# Altium PCB PCB1.PcbDoc (part 1 of 4)
Units mm, origin at the board's own origin, x right, y up, seen from the top; angles counter-clockwise.
Board outline 49 x 49 mm, 8 copper layers (L1(SIG), L2(GND), L3(SIG), L4(GND), L5(PWR), L6(PWR), L7(GND), L8(SIG)), stack 1.6 mm thick; 175 components, 123 nets, 646 pads, 355 vias.
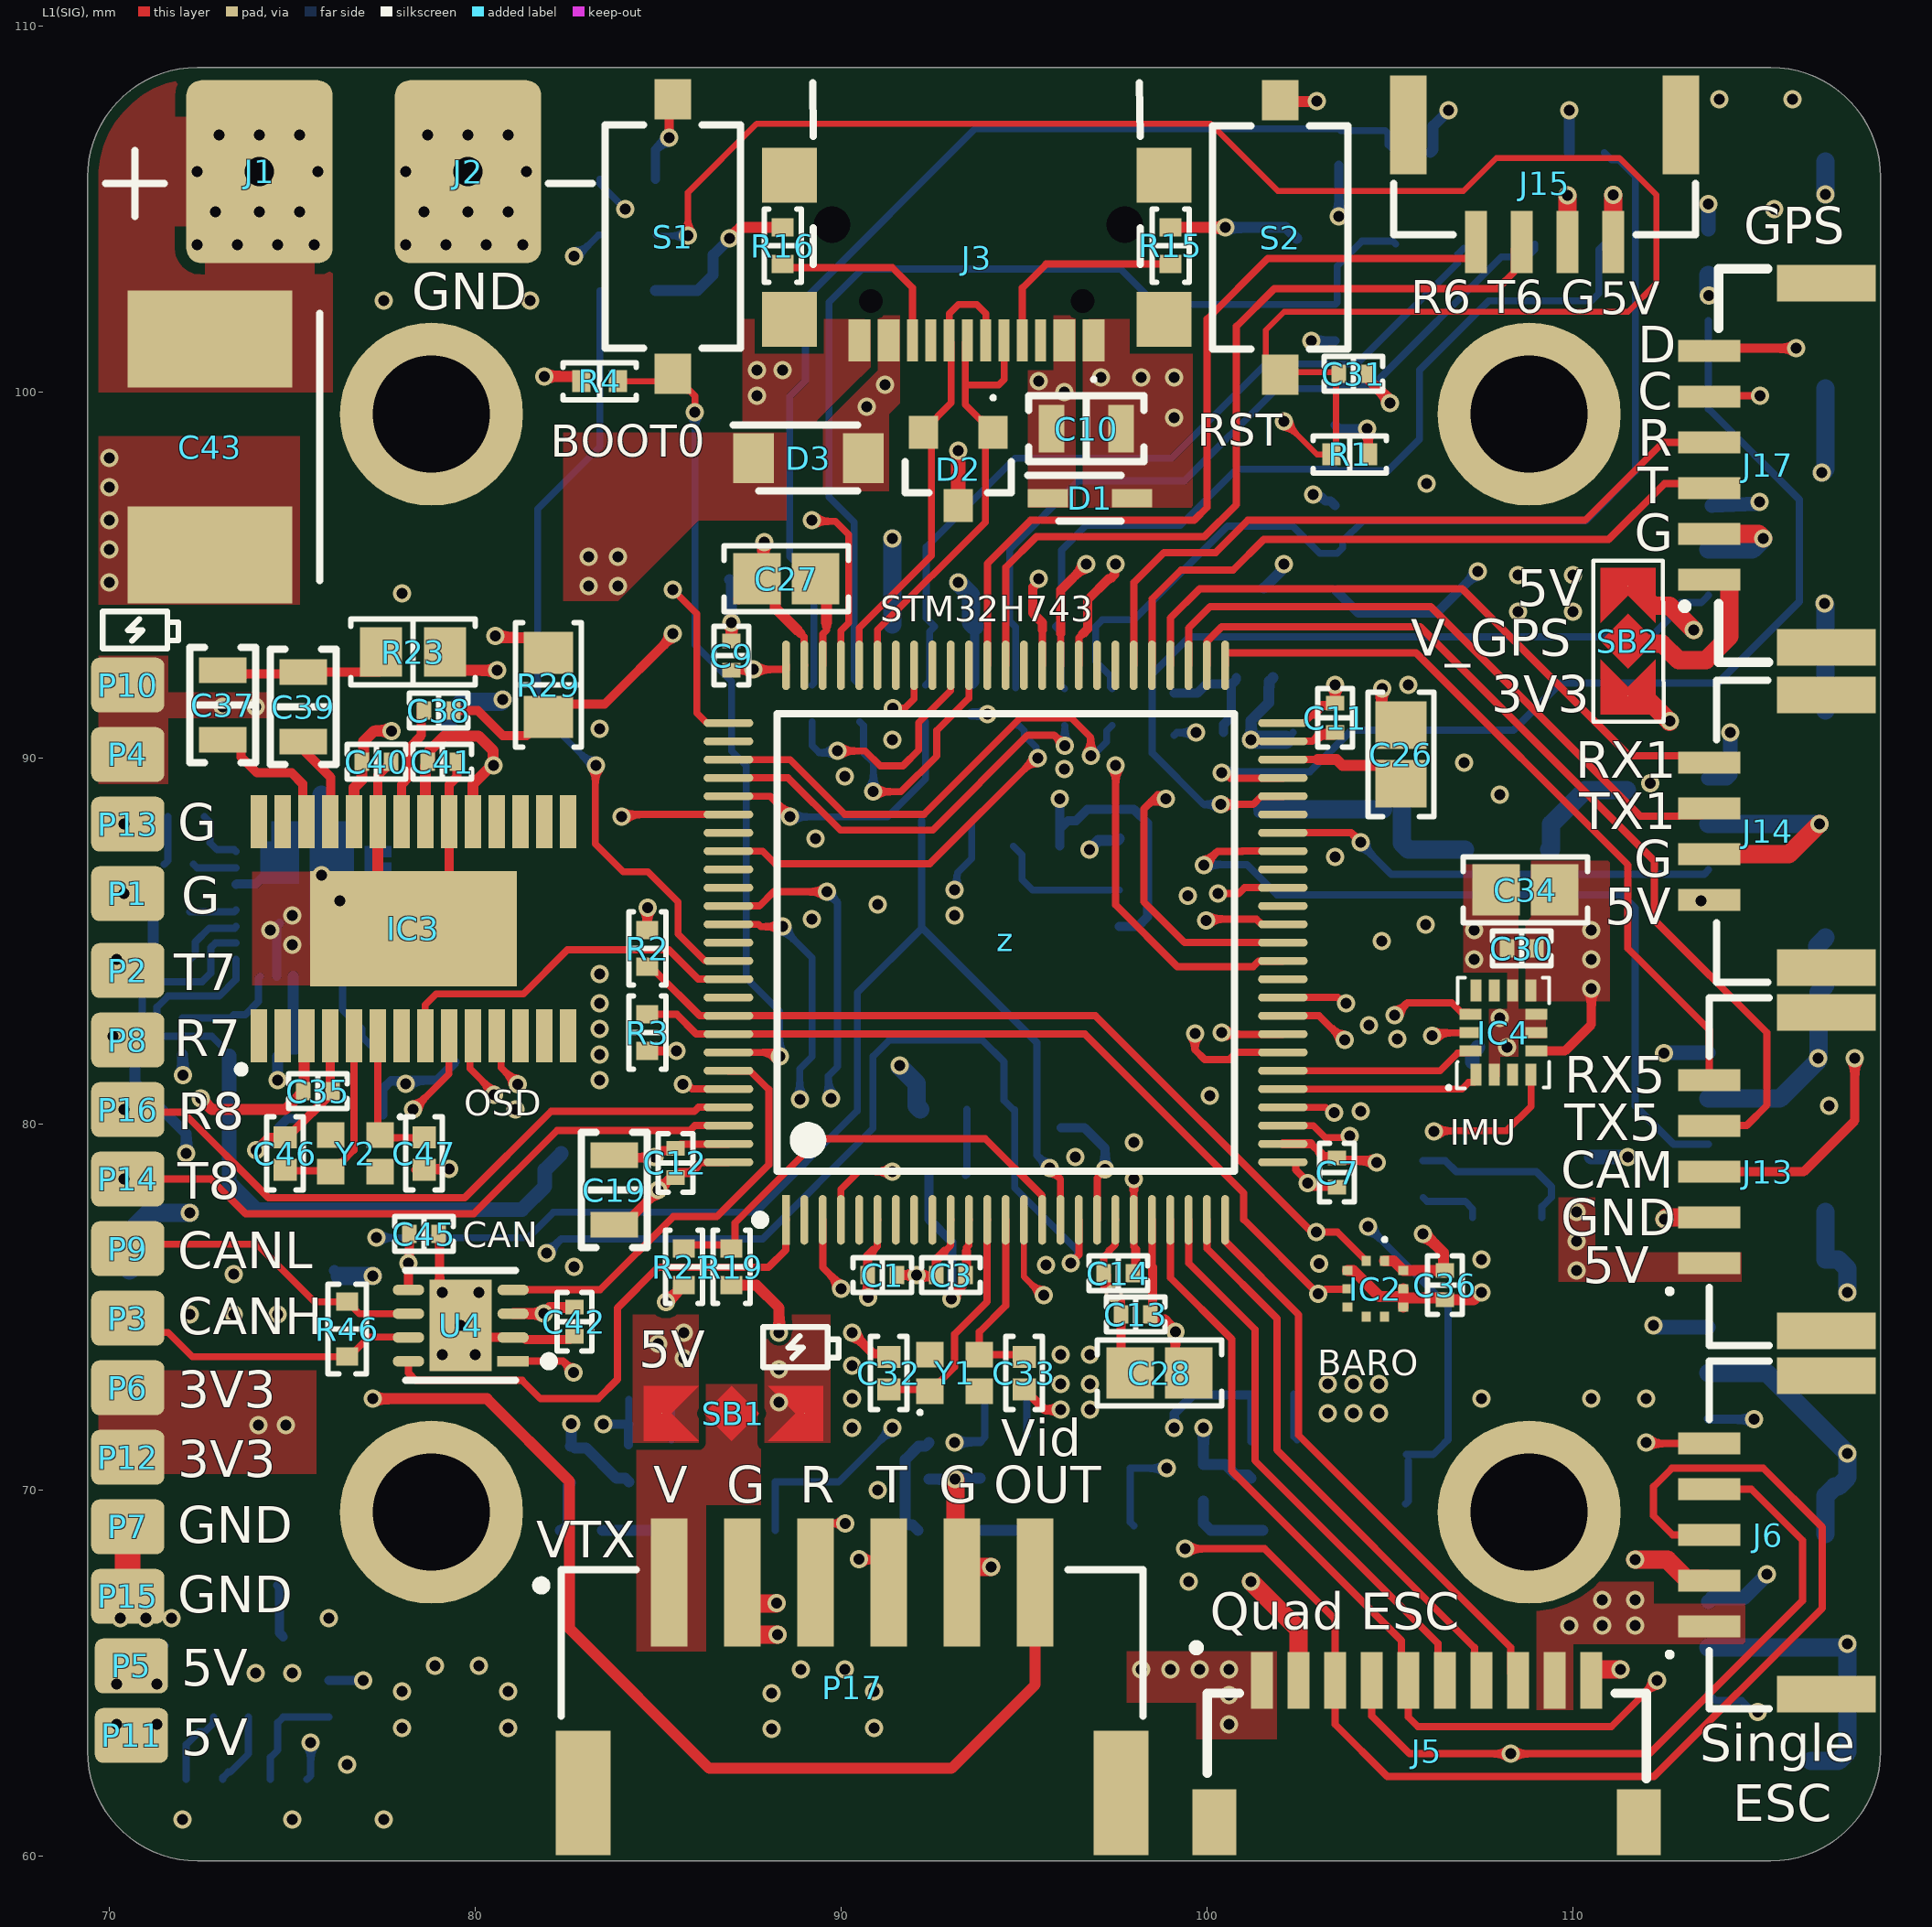
[diagram p0: L1(SIG) view]
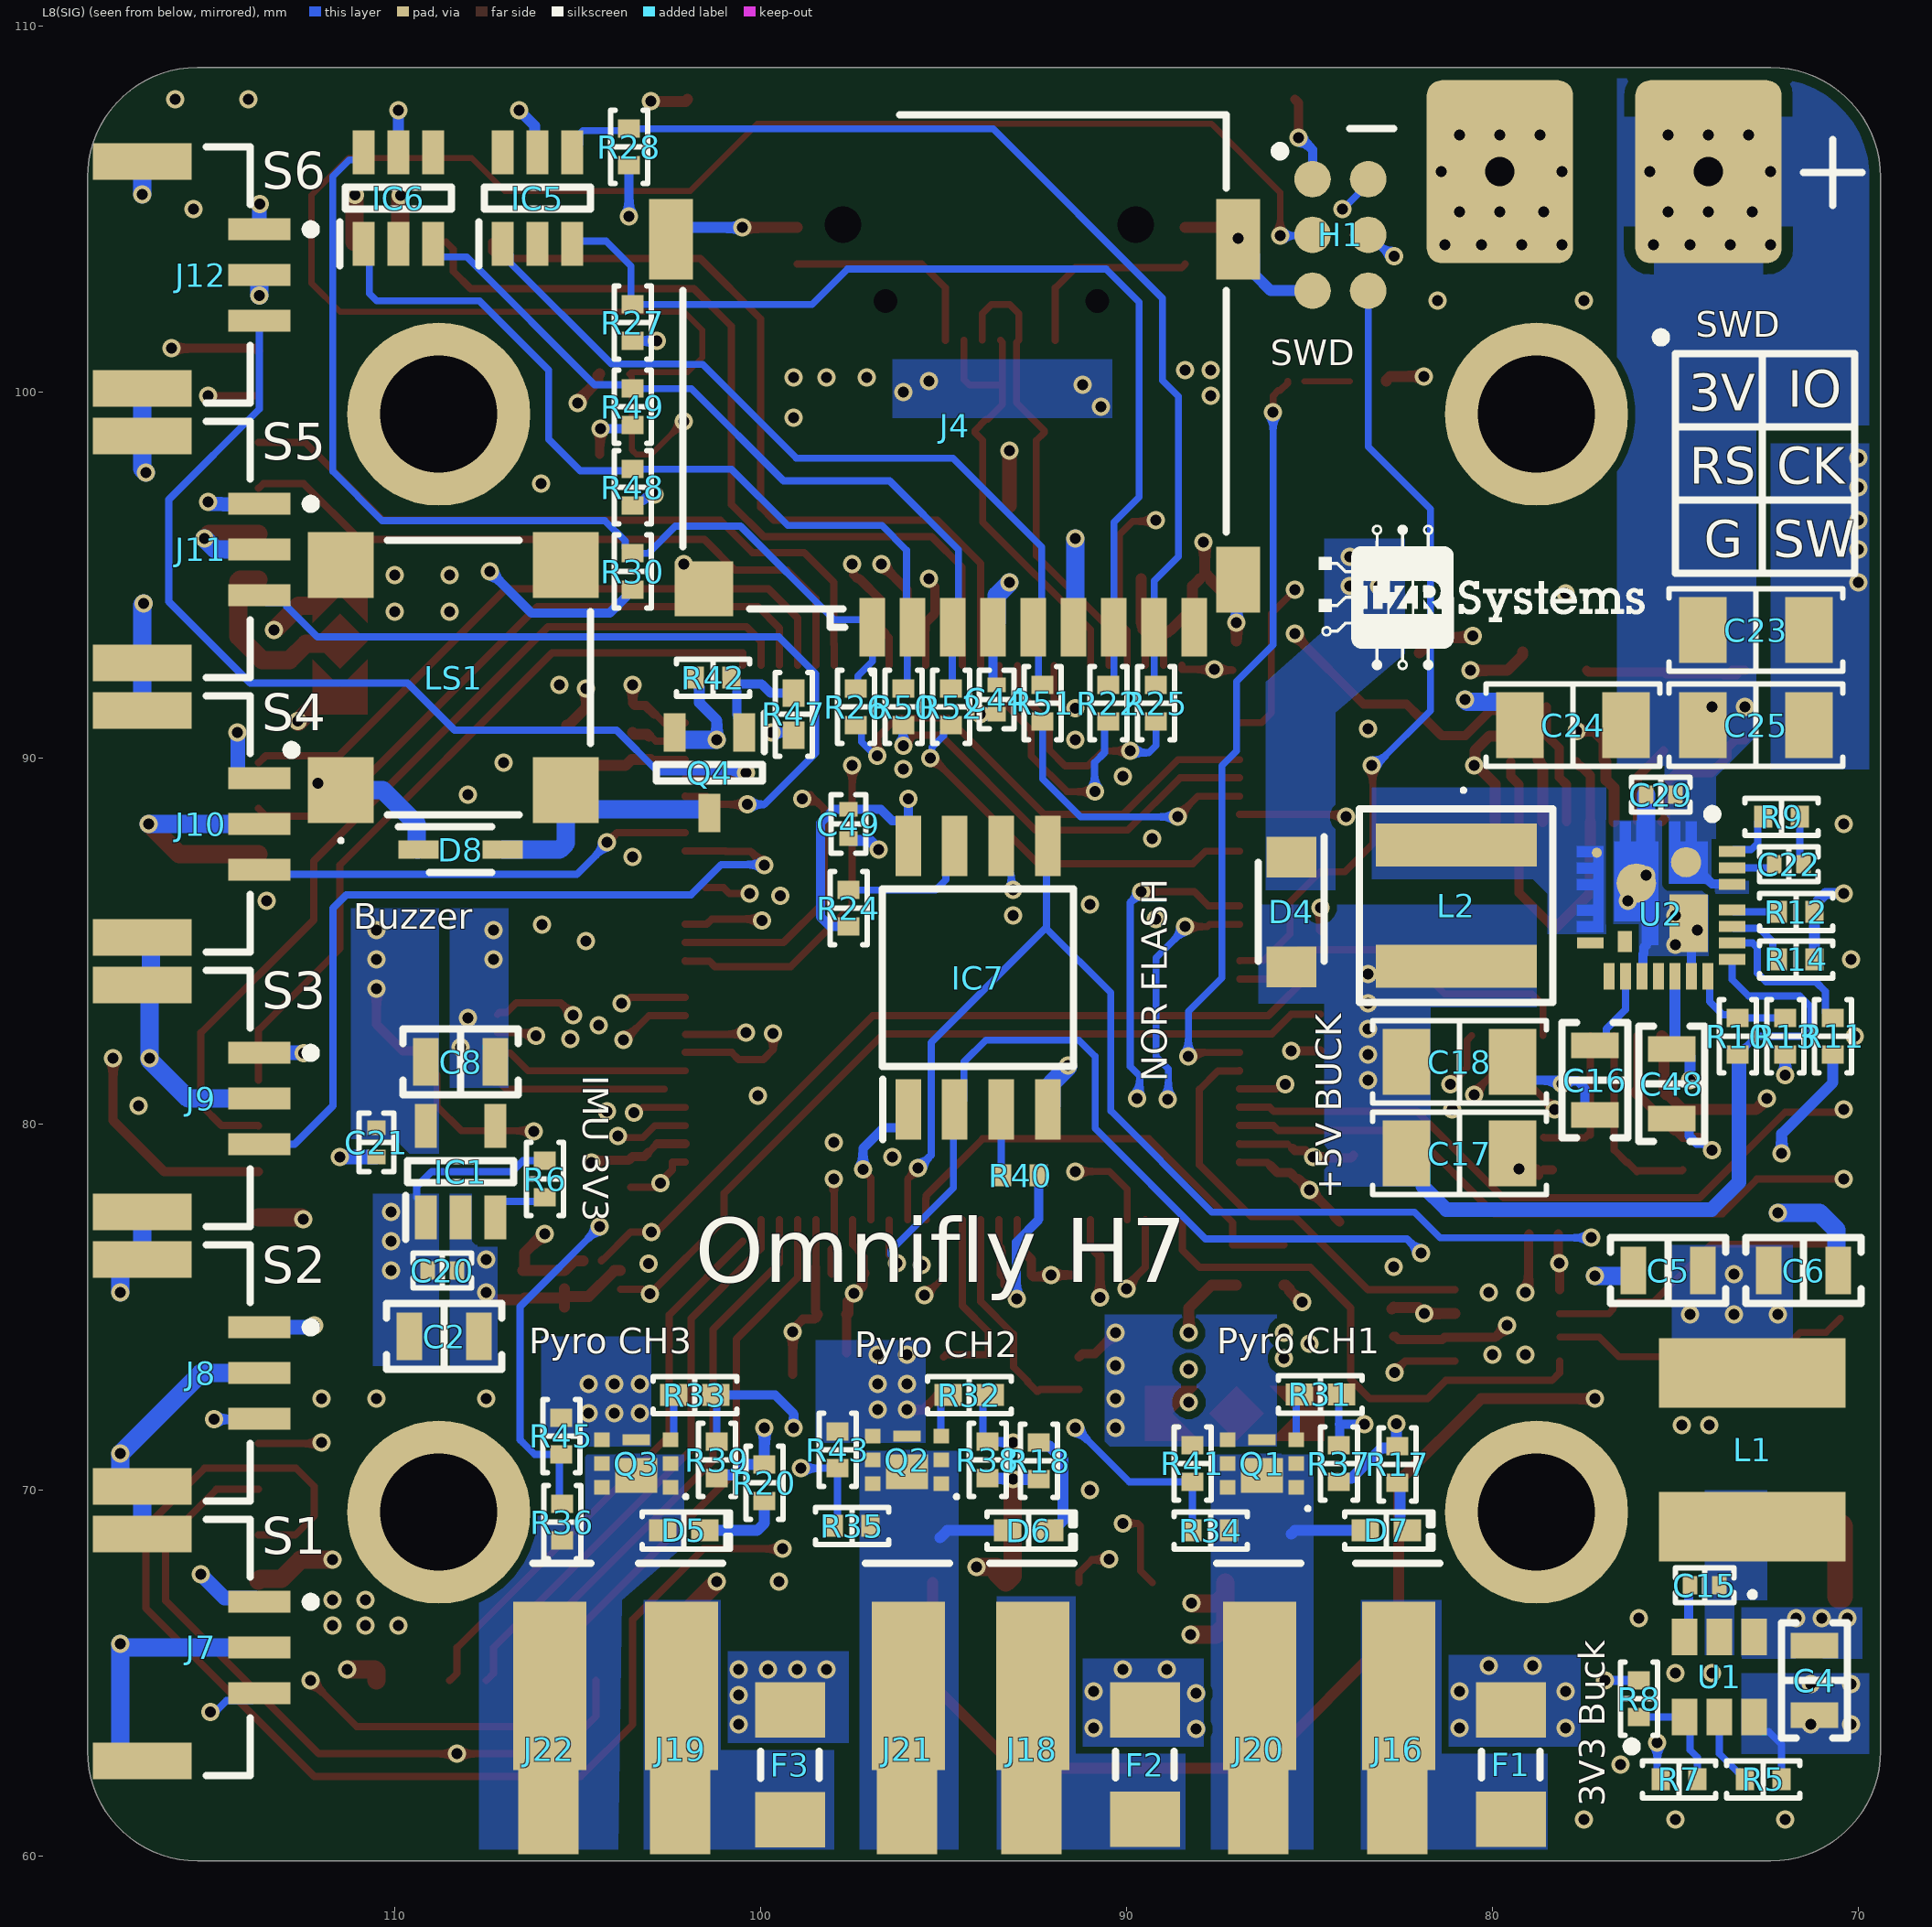
[diagram p1: L8(SIG) view, seen from below]
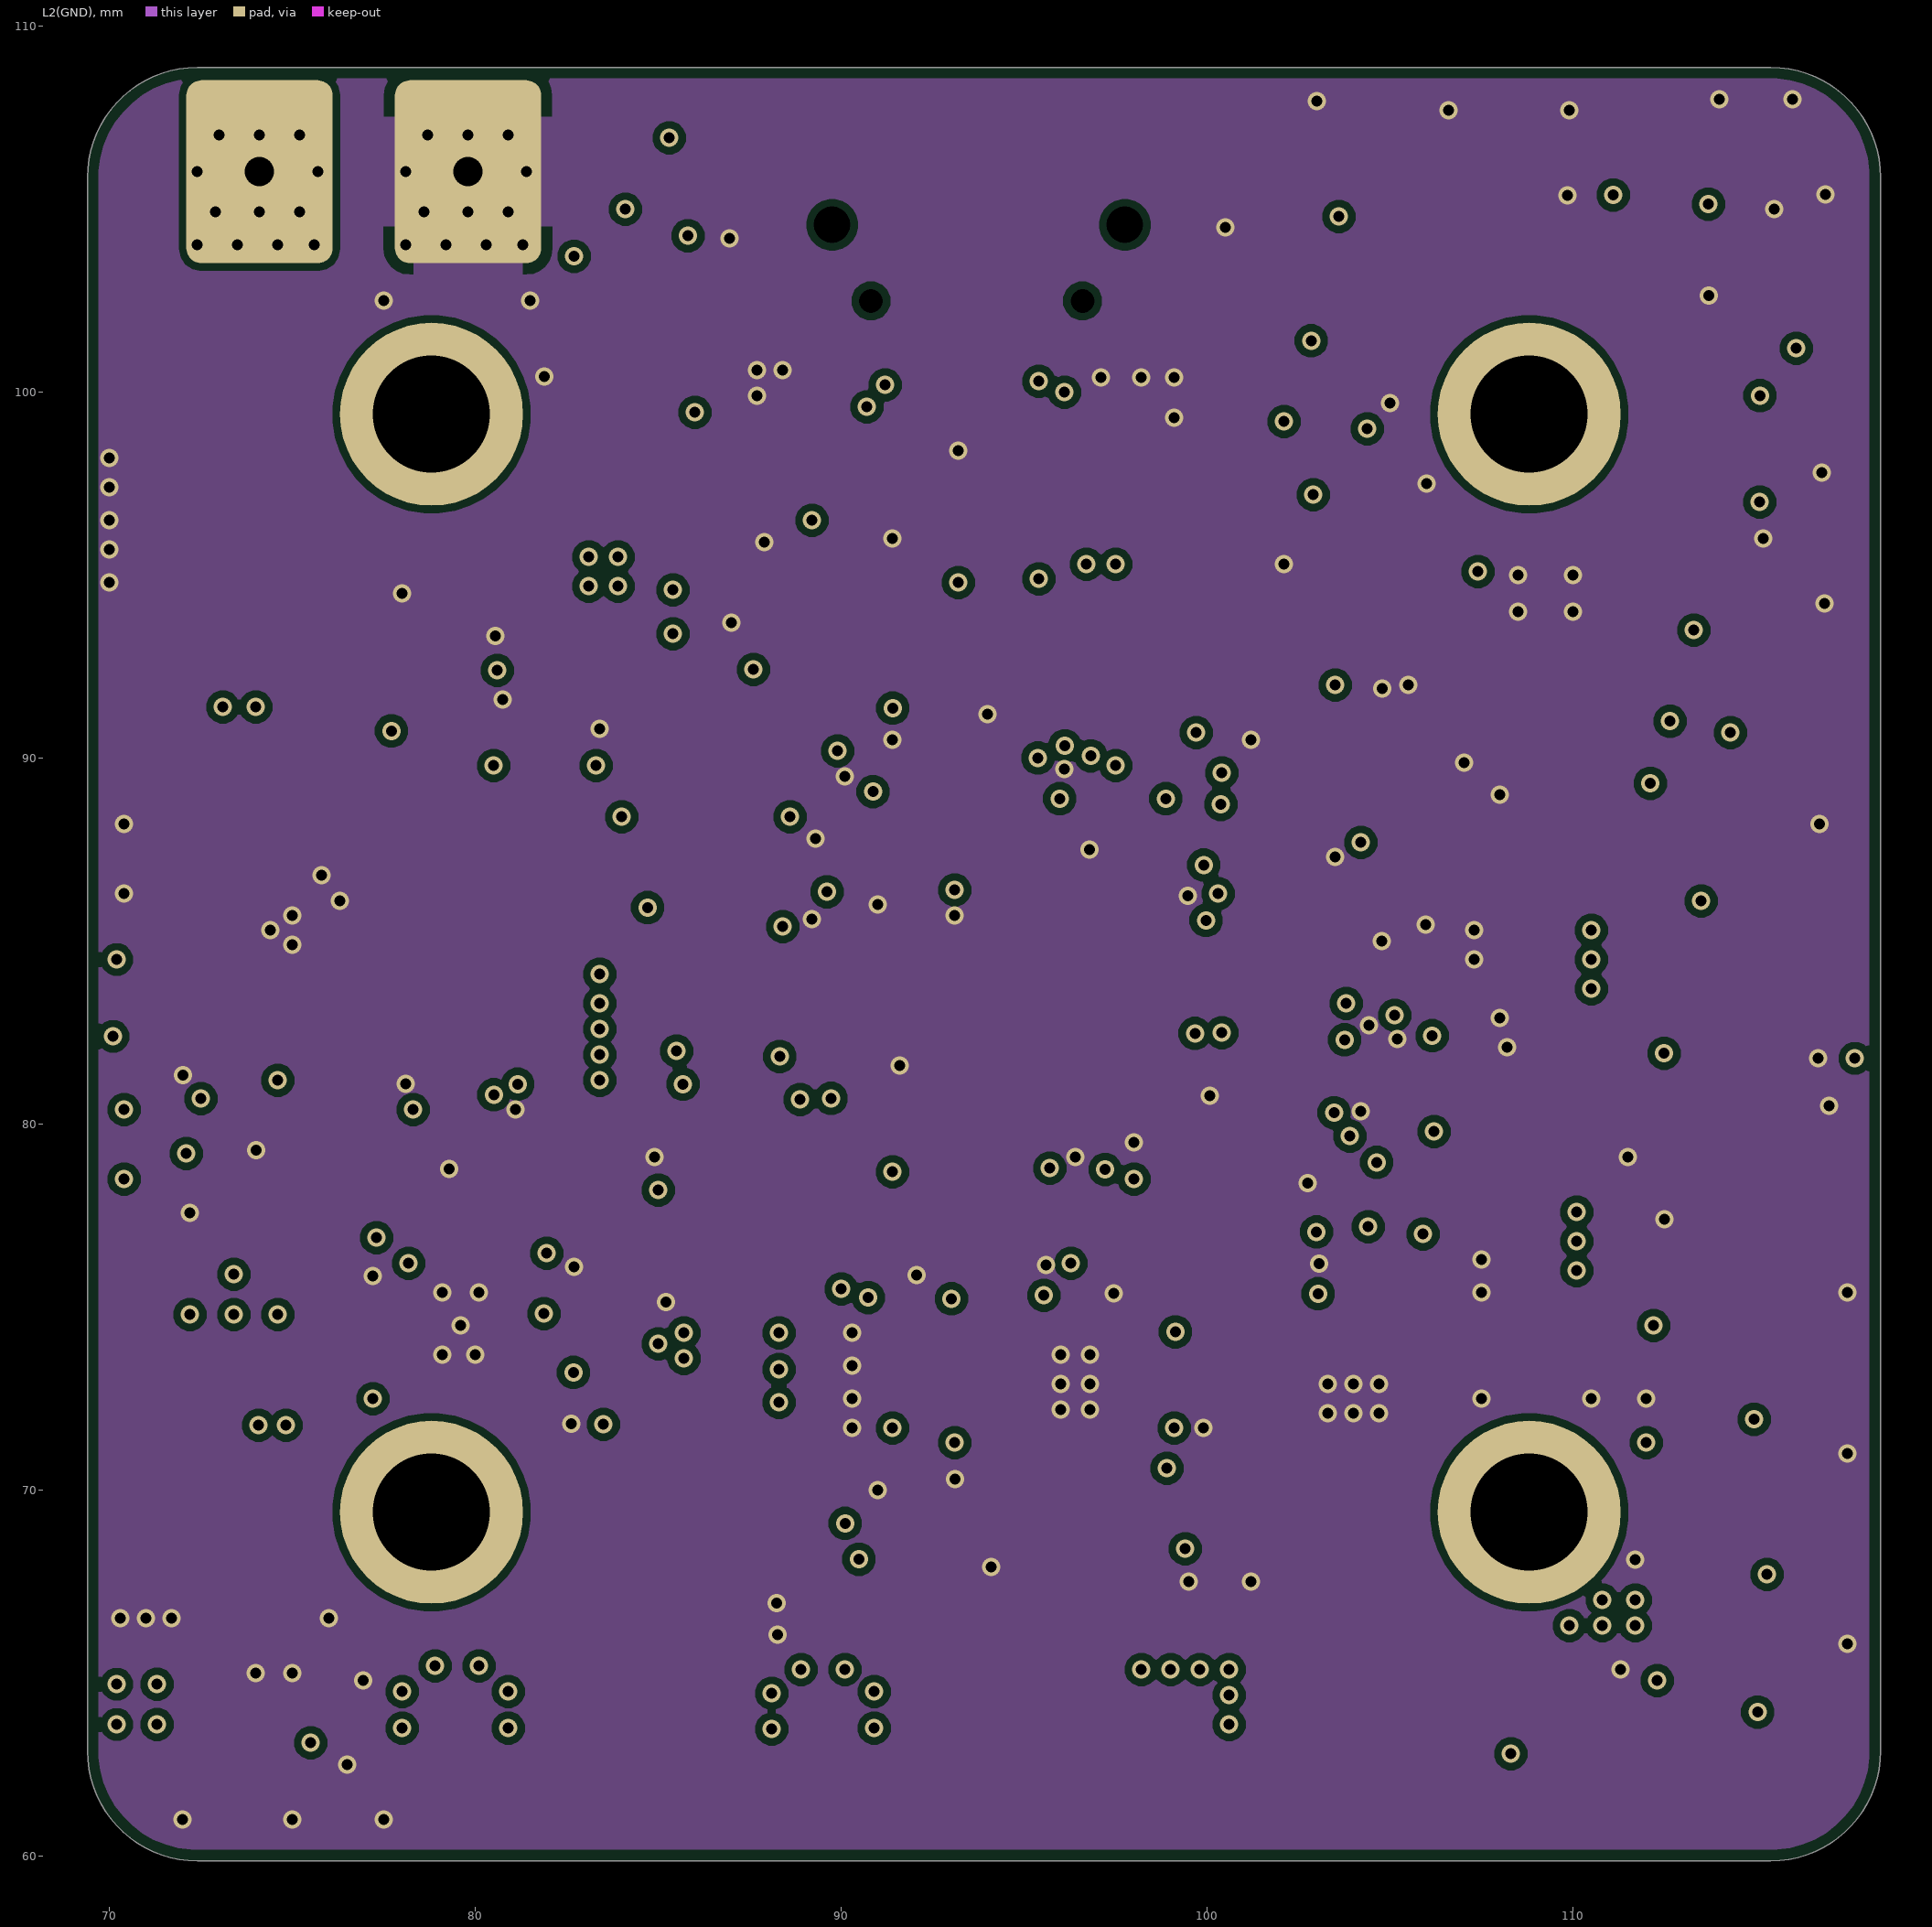
[diagram p2: L2(GND)]
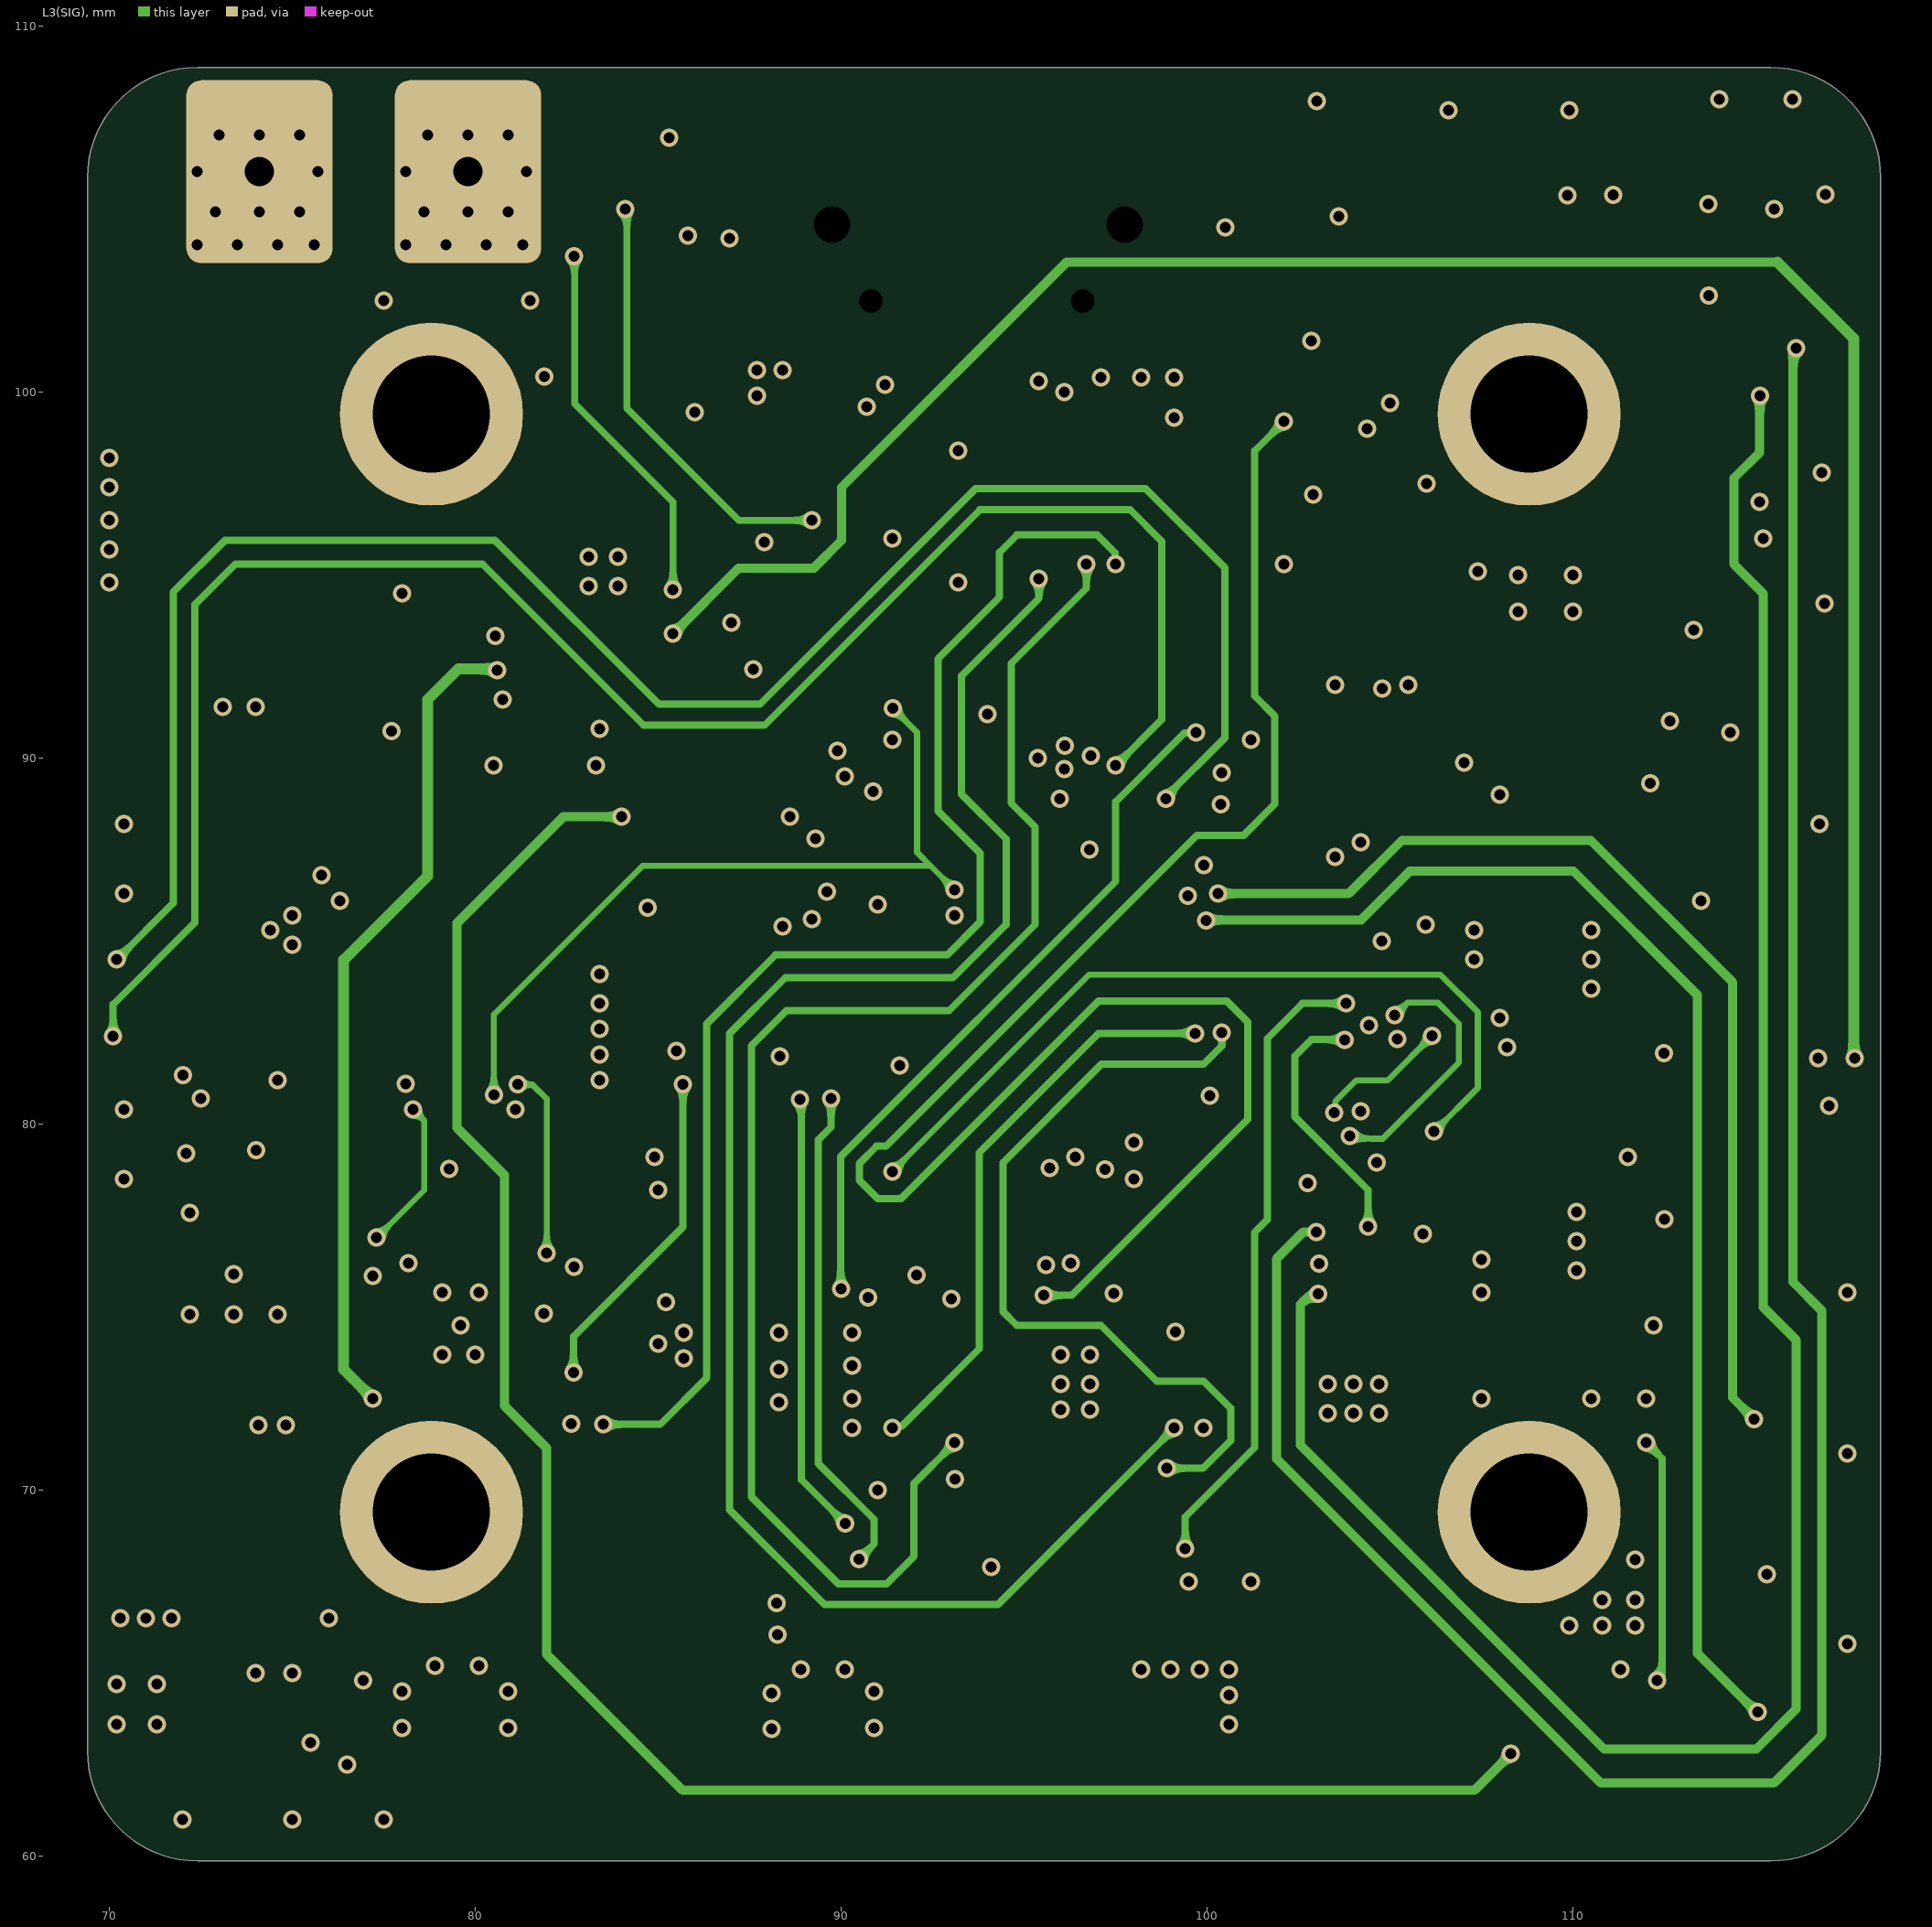
[diagram p3: L3(SIG)]
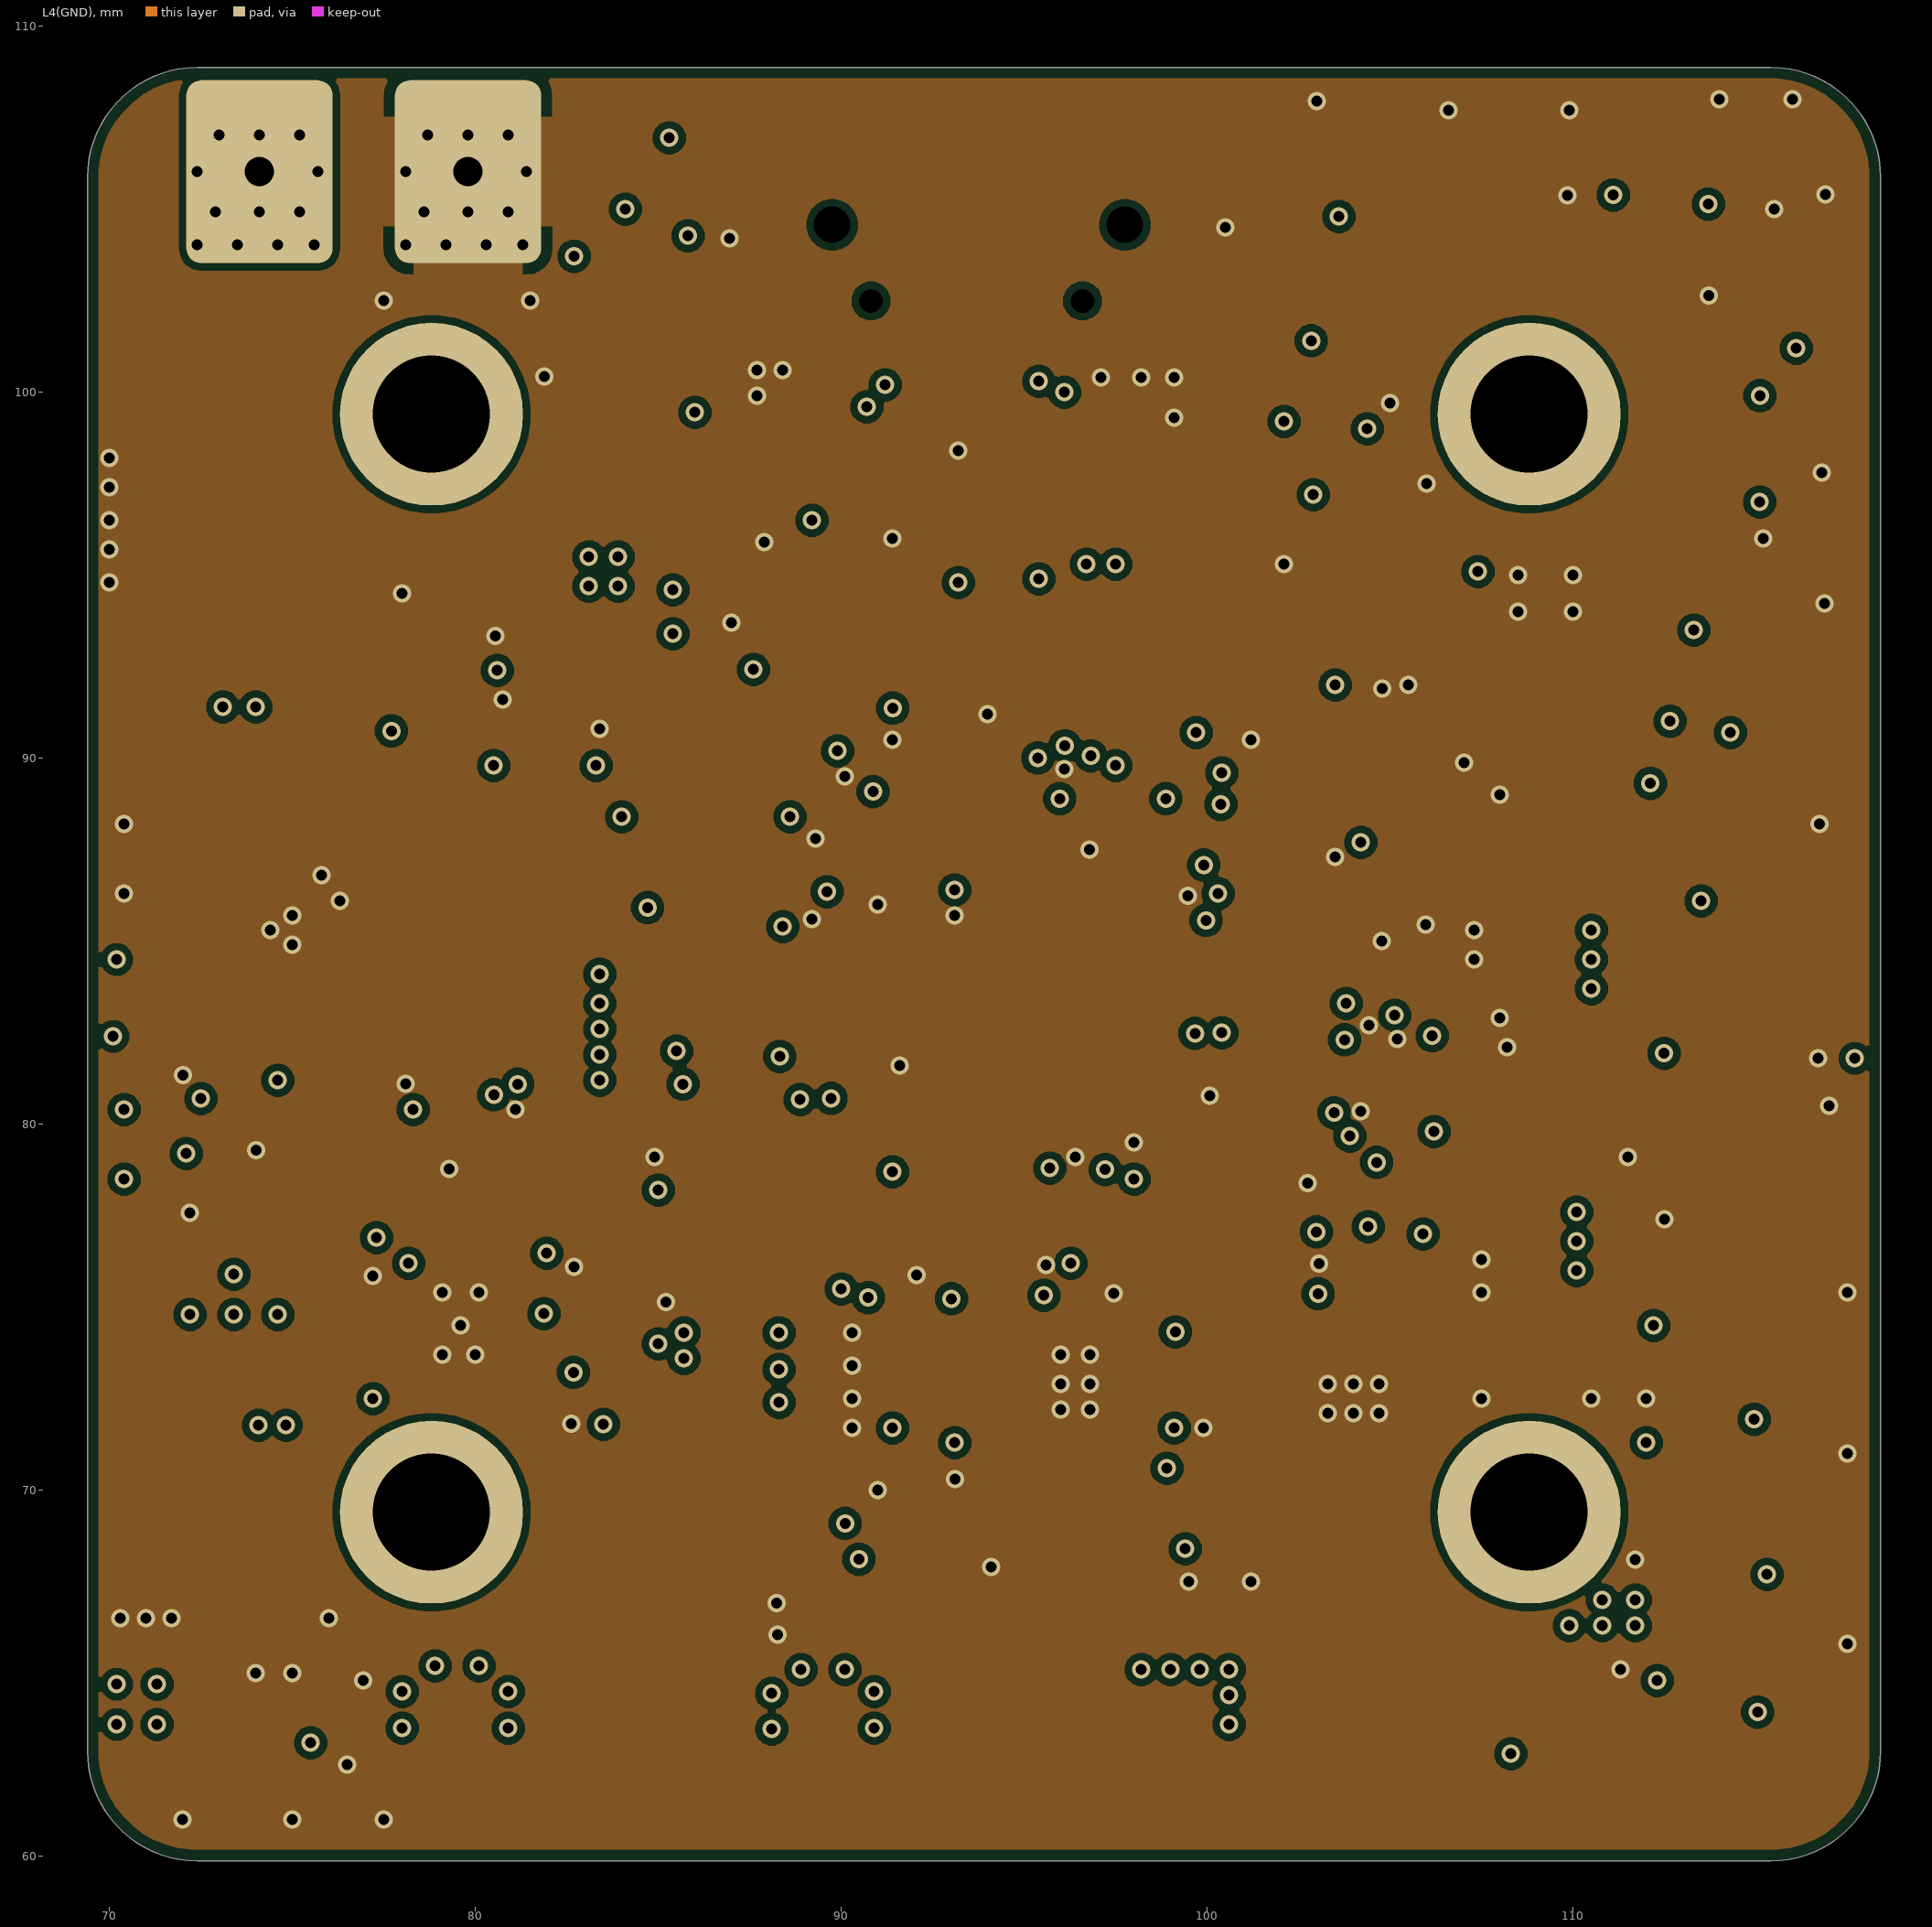
[diagram p4: L4(GND)]
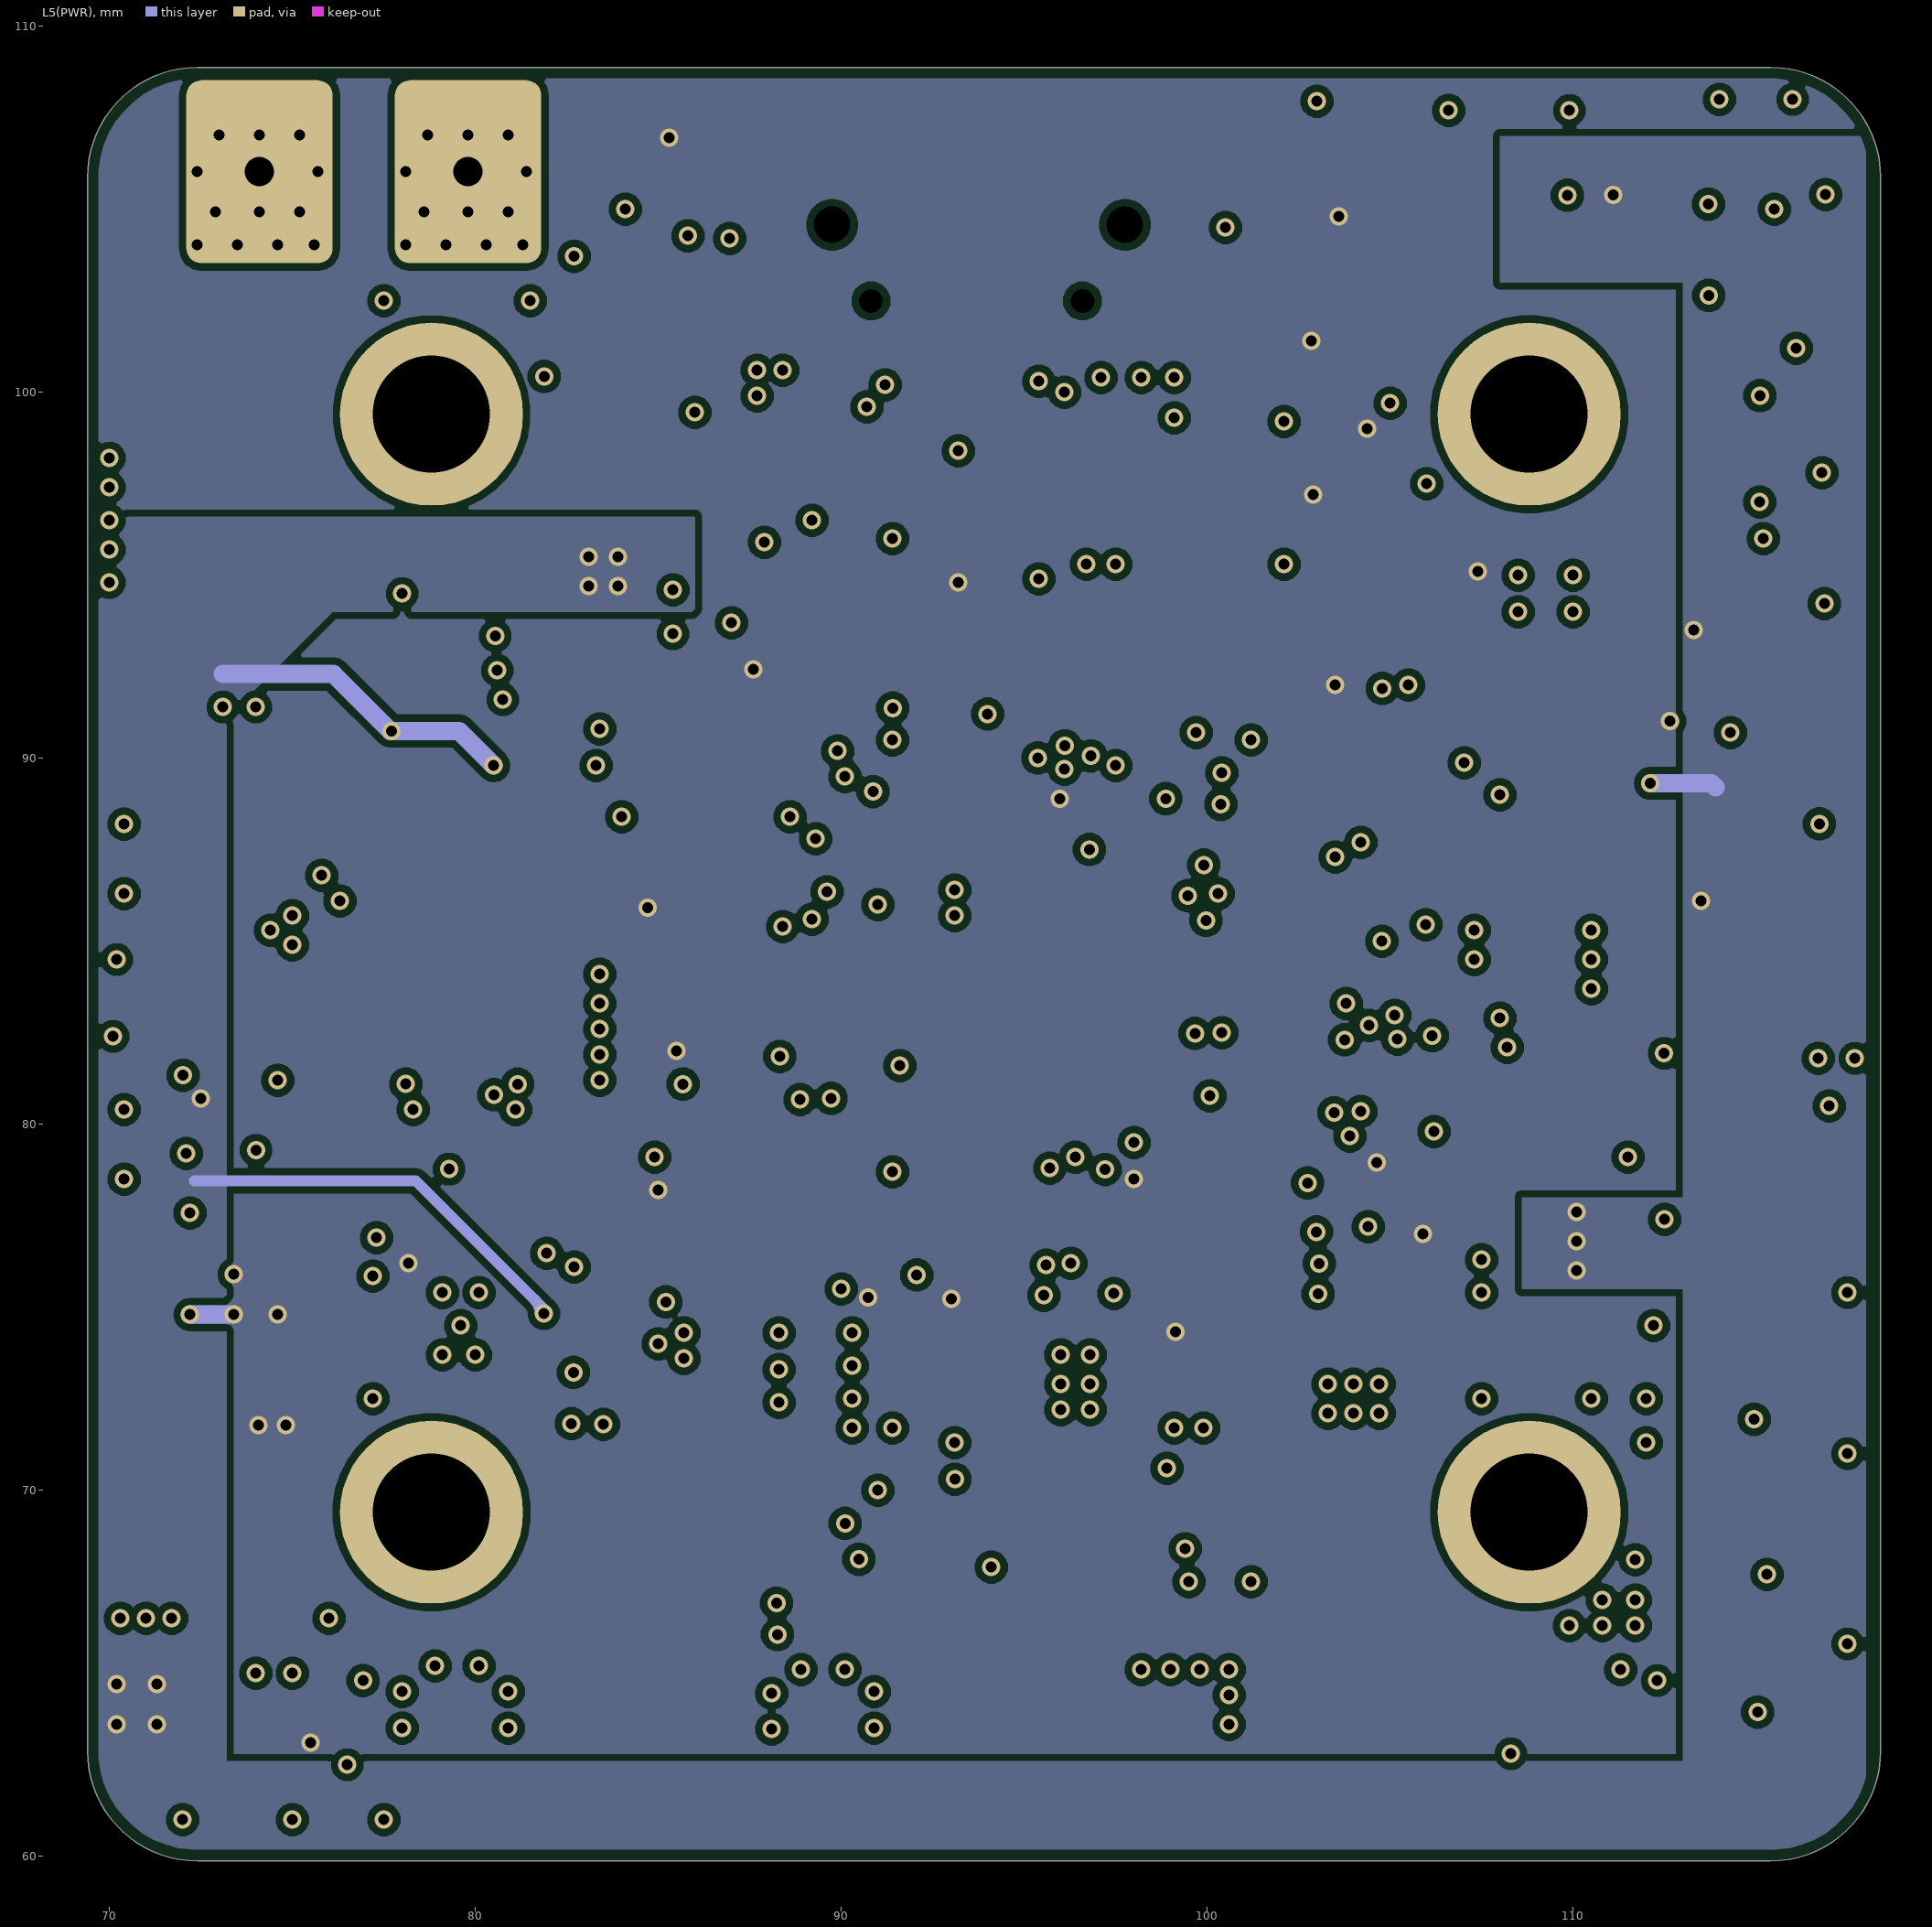
[diagram p5: L5(PWR)]
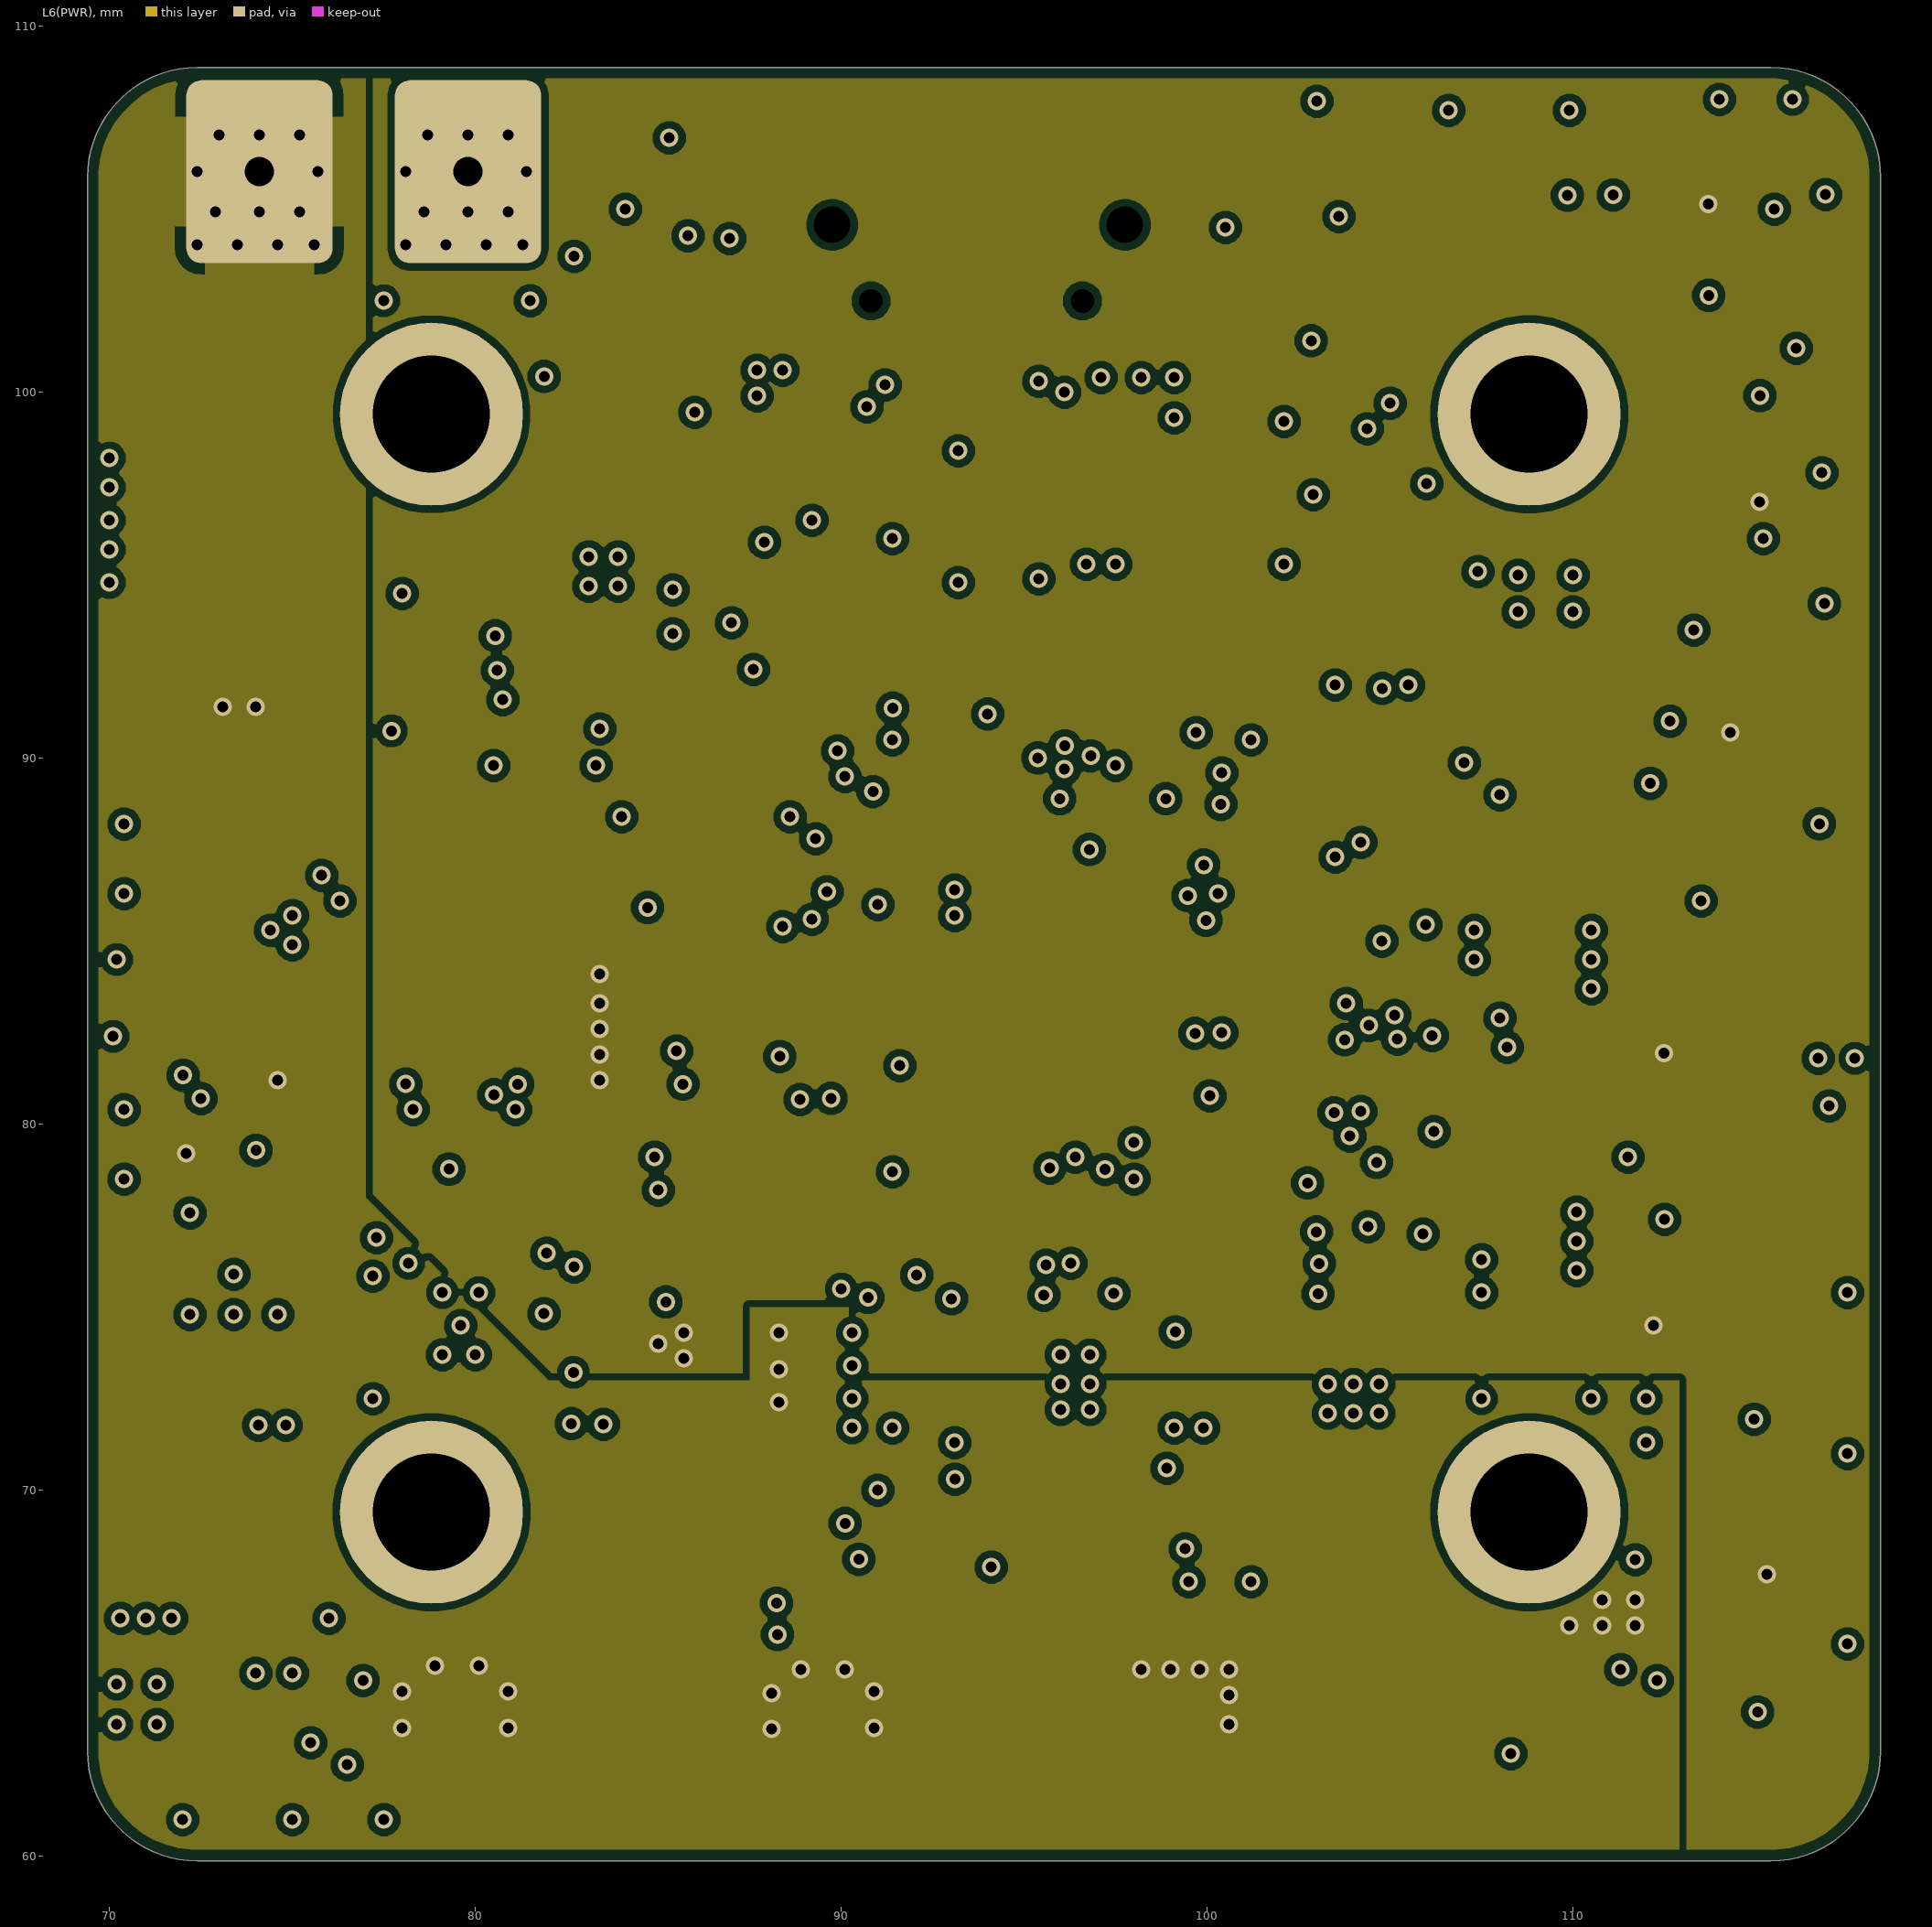
[diagram p6: L6(PWR)]
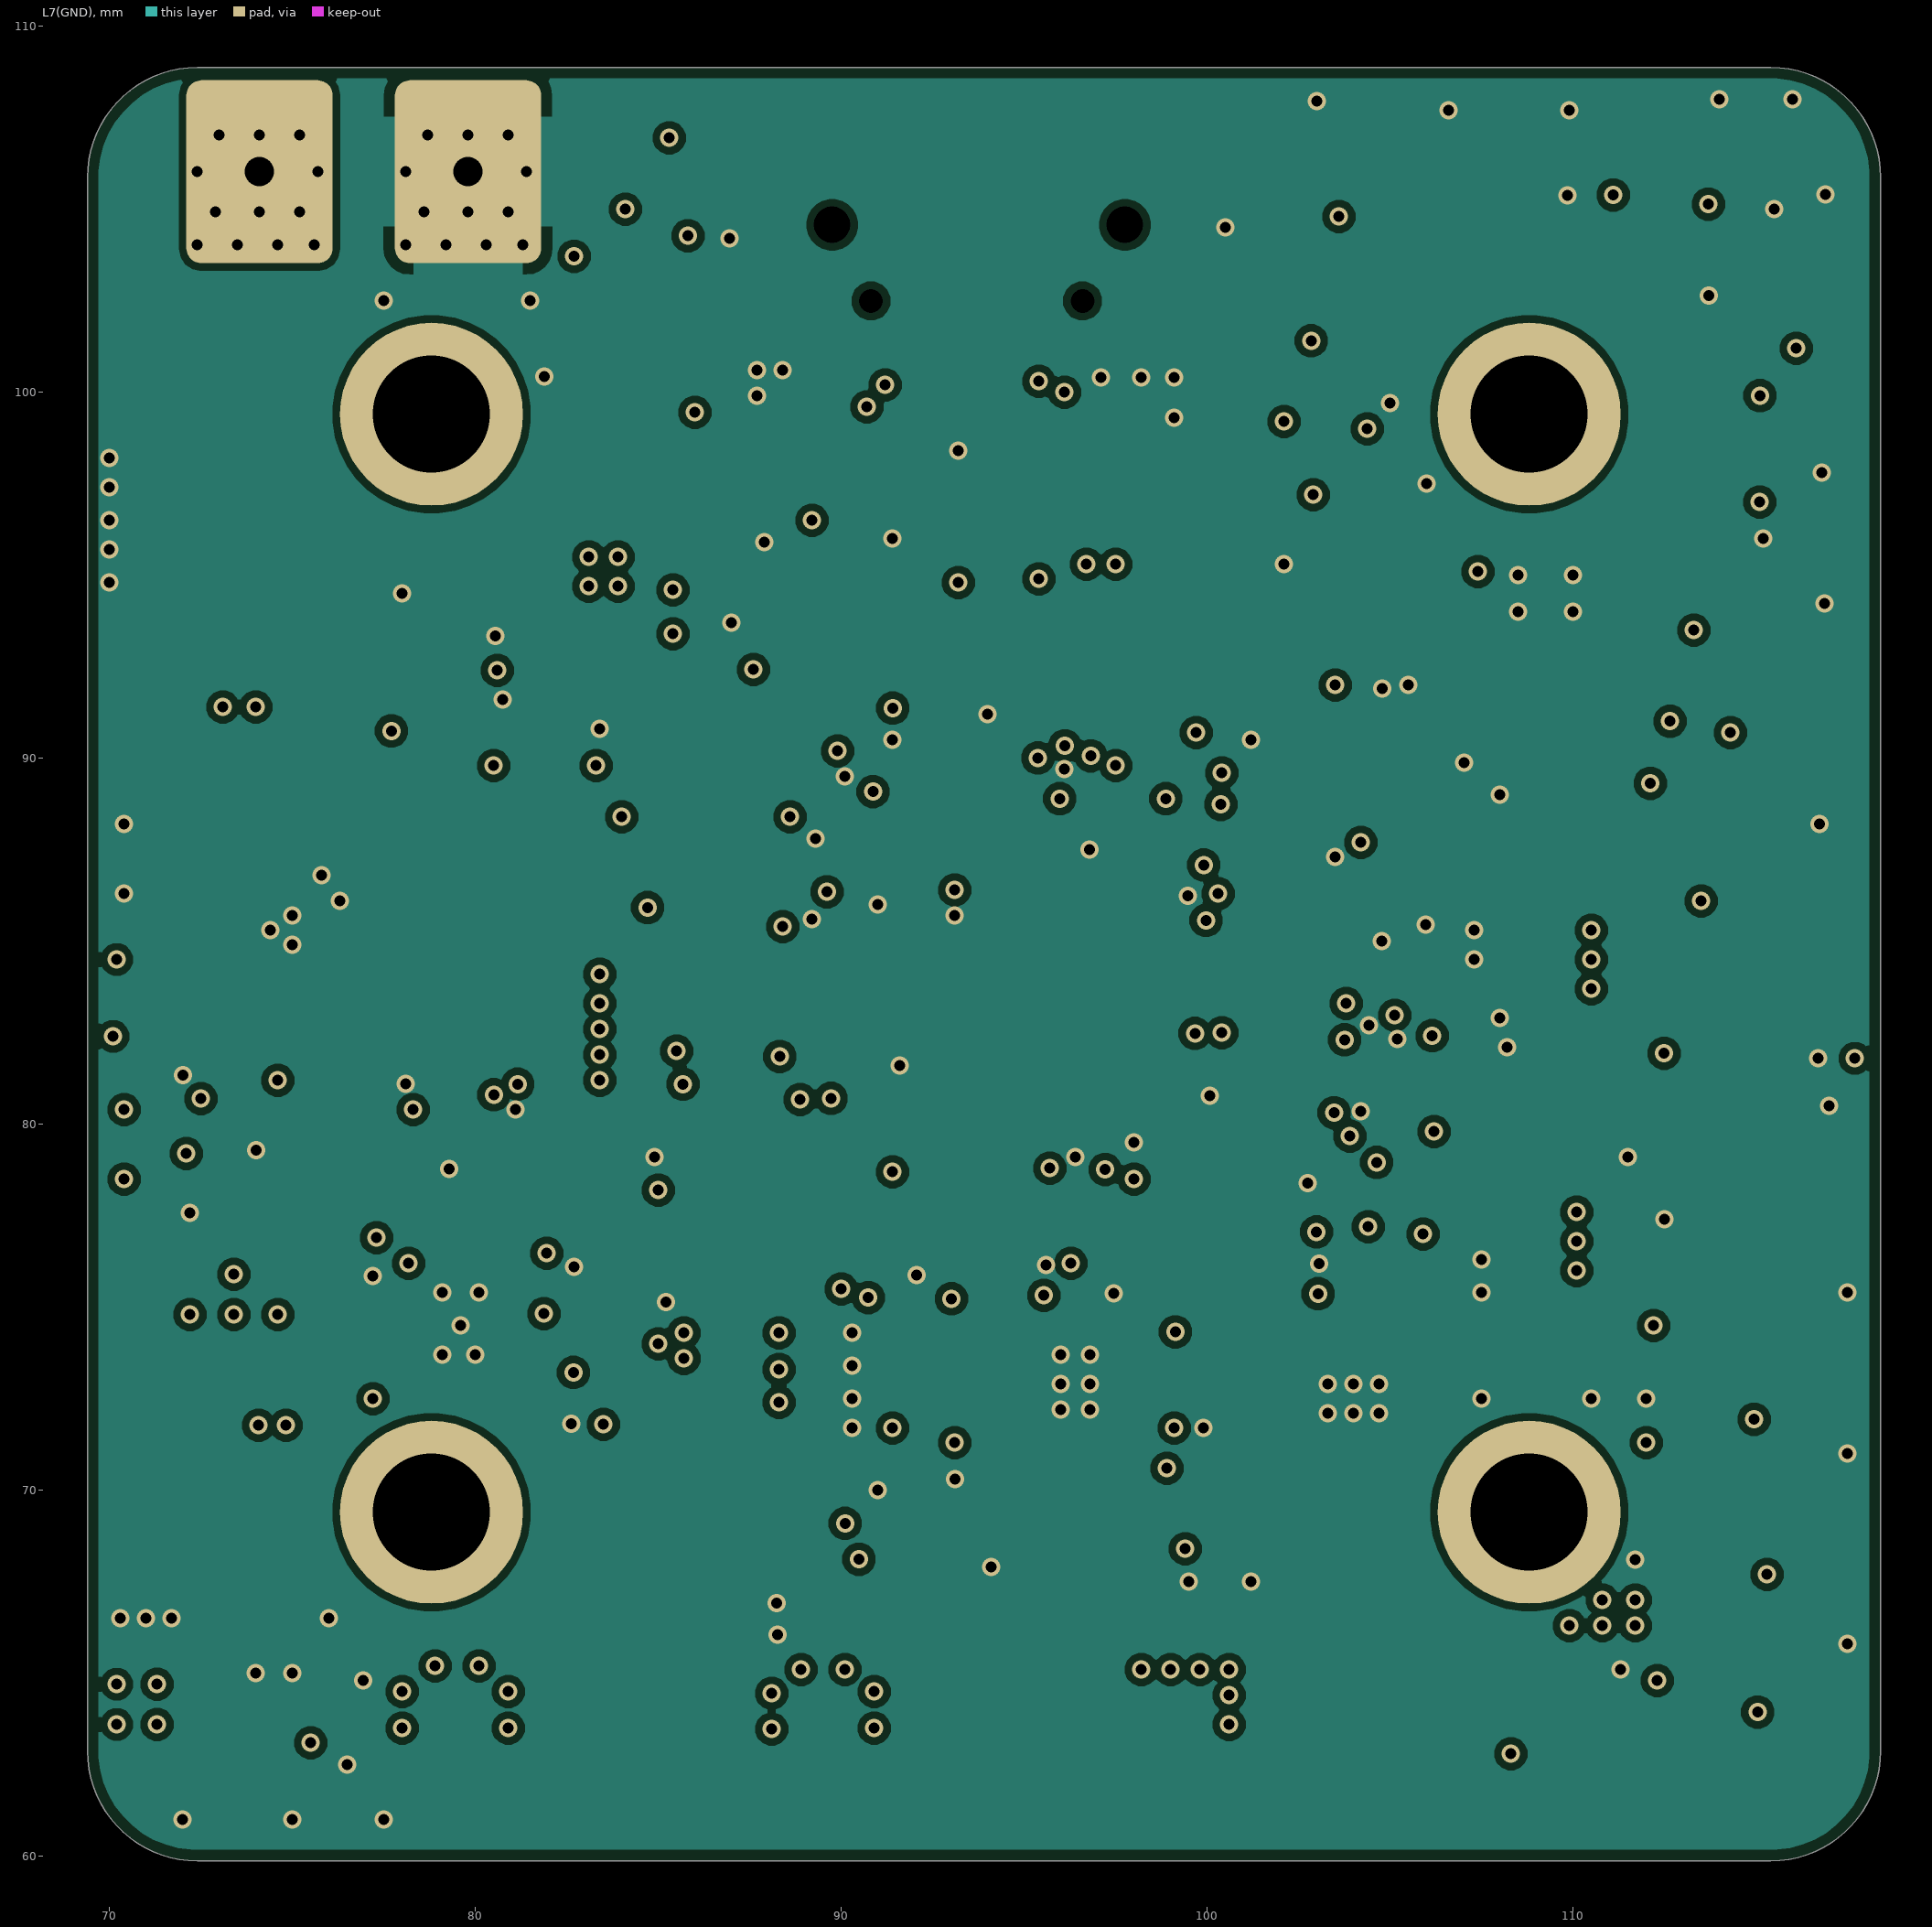
[diagram p7: L7(GND)]

## Layer stack, top to bottom
Top Mask: solder mask 0.015, Solder Resist, Dk 3.8
L1(SIG): signal copper 0.035
Dielectric 1: prepreg 0.1164, 2116, Dk 4.16
L2(GND): signal copper 0.0152
Core1: core 0.3, FR-4, Dk 4.5
L3(SIG): signal copper 0.0152
Dielectric 2: prepreg 0.0764, 1080, Dk 4.16
Dielectric 3: prepreg 0.0764, 1080, Dk 4.16
L4(GND): signal copper 0.0152
Core2: core 0.3, FR-4, Dk 4.5
L5(PWR): signal copper 0.0152
Dielectric 4: prepreg 0.0764, 1080, Dk 4.16
Dielectric 5: prepreg 0.0764, 1080, Dk 4.16
L6(PWR): signal copper 0.0152
Core3: core 0.3, FR-4, Dk 4.5
L7(GND): signal copper 0.0152
Dielectric 6: prepreg 0.1164, 2116, Dk 4.16
L8(SIG): signal copper 0.035
Bottom Mask: solder mask 0.015, Solder Resist, Dk 3.8

## Board outline
69.4,62.875 69.4,105.875 cw(c72.4,105.875) 72.4,108.875 115.4,108.875 cw(c115.4,105.875) 118.4,105.875 118.4,62.875 cw(c115.4,62.875) 115.4,59.875 72.4,59.875 cw(c72.4,62.875)

## Design rules (kind name [scope] priority, off if disabled: settings)
BoardOutlineClearance [All] p1: gap=0.3 ignorepadtopadclearanceinfootprint=FALSE except(0: SMDPad-OutlineEdge; 0.4: Arc-SplitBarrior Arc-SplitContinuation Track-SplitBarrior Track-SplitContinuation SMDPad-SplitBarrior SMDPad-SplitContinuation THPad-SplitBarrior THPad-SplitContinuation Via-SplitBarrior Via-SplitContinuation Fill-SplitBarrior Fill-SplitContinuation Poly-SplitBarrior Poly-SplitContinuation Region-SplitBarrior Region-SplitContinuation Text-SplitBarrior Text-SplitContinuation)
Clearance Clearance_BUCK [InNet('SW_5V')] p1: gap=0.203 ignorepadtopadclearanceinfootprint=TRUE except(0: SMDPad-SMDPad SMDPad-Fill SMDPad-Poly SMDPad-Region; 0.254: Arc-Text Track-Text SMDPad-Text THPad-Text Via-Text Fill-Text Poly-Text Region-Text Text-Text)
Clearance "Clearance Different Nets" [All] p2: gap=0.2 ignorepadtopadclearanceinfootprint=TRUE except(0.089: Arc-Arc Arc-Track Arc-SMDPad Track-Track Track-SMDPad; 0.127: SMDPad-SMDPad SMDPad-Via THPad-Via Via-Via; 0.254: Arc-Via Arc-Text Track-Via Track-Text SMDPad-Text THPad-Text Via-Text Fill-Text Poly-Text Region-Text Text-Text; 0.5: THPad-THPad)
Clearance "Clearance Same Nets" [All] p3: gap=0.2 ignorepadtopadclearanceinfootprint=TRUE except(0: SMDPad-Via SMDPad-Hole THPad-Via THPad-Hole Via-Fill Via-Poly Via-Region Fill-Hole Poly-Hole Region-Hole; 0.089: Arc-Arc Arc-Track Arc-SMDPad Track-Track Track-SMDPad SMDPad-SMDPad; 0.254: Arc-Via Arc-Text Track-Via Track-Text SMDPad-Text THPad-Text Via-Text Fill-Text Poly-Text Region-Text Text-Text)
Clearance "Clearance Bottom Layer" [OnLayer('Bottom Layer')] p4: gap=0.203 ignorepadtopadclearanceinfootprint=TRUE except(0.254: Arc-Text Track-Text SMDPad-Text THPad-Text Via-Text Fill-Text Poly-Text Region-Text Text-Text)
Clearance "Clearance Top Layer" [OnLayer('Top Layer')] p5: gap=0.203 ignorepadtopadclearanceinfootprint=TRUE except(0.254: Arc-Text Track-Text SMDPad-Text THPad-Text Via-Text Fill-Text Poly-Text Region-Text Text-Text)
DiffPairsRouting [All] p1: maxlimit=0.2 minlimit=0.127 mostfreqgap=0.127 toplayer_mingap=0.2 toplayer_prefgap=0.2 toplayer_minwidth=0.187 toplayer_maxwidth=0.187 toplayer_prefwidth=0.187 midlayer1_maxgap=0.127 midlayer1_minwidth=0.116 midlayer1_maxwidth=0.116 midlayer1_prefwidth=0.116 midlayer2_maxgap=0.127 midlayer2_minwidth=0.134 midlayer2_maxwidth=0.134 midlayer2_prefwidth=0.134 midlayer3_maxgap=0.127 midlayer3_minwidth=0.132 midlayer3_maxwidth=0.132 midlayer3_prefwidth=0.132 midlayer4_maxgap=0.127 midlayer4_minwidth=0.134 midlayer4_maxwidth=0.134 midlayer4_prefwidth=0.134 midlayer5_maxgap=0.127 midlayer5_minwidth=0.14 midlayer5_maxwidth=0.14 midlayer5_prefwidth=0.14 midlayer6_maxgap=0.127 midlayer6_minwidth=0.219 midlayer6_maxwidth=0.219 midlayer6_prefwidth=0.219 bottomlayer_maxgap=0.127 bottomlayer_minwidth=0.154 bottomlayer_maxwidth=0.154 bottomlayer_prefwidth=0.154 impedanceprofiledriven=TRUE impedanceprofileid={6E2BD9C2-D616-4FBC-9F1E-A9F383BE8C07} impedanceprofilevalue=90.000000 maxuncoupledlength=30
HoleSize [All] p1: absolutevalues=TRUE maxlimit=6.3 minlimit=0.2 maxpercent=80.000 minpercent=20.000
MinimumAnnularRing [All] p1: minimumring=0.01
MinimumSolderMaskSliver [All] p1: minsoldermaskwidth=0
PolygonConnect PWR_Connect [InNet('+VBATT')or InNet('GND')] p1: thpad.connectstyle=Relief thpad.reliefconductorwidth=3 thpad.reliefentries=4 thpad.polygonreliefangle="90 Angle" thpad.airgapwidth=0.3 smdpad.connectstyle=Direct smdpad.reliefconductorwidth=0.508 smdpad.reliefentries=4 smdpad.polygonreliefangle="90 Angle" smdpad.airgapwidth=0.254 via.connectstyle=Direct via.reliefconductorwidth=0.508 via.reliefentries=4 via.polygonreliefangle="90 Angle" via.airgapwidth=0.254
PolygonConnect [All] p2: thpad.connectstyle=Relief thpad.reliefconductorwidth=1 thpad.reliefentries=4 thpad.polygonreliefangle="90 Angle" thpad.airgapwidth=0.254 smdpad.connectstyle=Direct smdpad.reliefconductorwidth=0.508 smdpad.reliefentries=4 smdpad.polygonreliefangle="90 Angle" smdpad.airgapwidth=0.254 via.connectstyle=Direct via.reliefconductorwidth=0.508 via.reliefentries=4 via.polygonreliefangle="90 Angle" via.airgapwidth=0.254
RoutingCorners [All] p1: cornerstyle=Round minsetback=2.54 maxsetback=2.54
RoutingVias [All] p1: holewidth=0.5 width=1 viastyle="Through Hole" minholewidth=0.2 minwidth=0.35 maxholewidth=1 maxwidth=2
SilkToSilkClearance [All] p1: silktosilkclearance=0.1
SilkToSolderMaskClearance [IsPad] p1: minsilkscreentomaskgap=0.1 clearancetoexposedcopper=TRUE
SolderMaskExpansion [All] p1: expansion=0.03 istentingtop=FALSE
SupplyNets "Schematic Supply Nets_14" [InNet('+5VUSB')] p1: voltage=0.000
SupplyNets "Schematic Supply Nets_13" [InNet('+5VBUCK')] p2: voltage=0.000
SupplyNets "Schematic Supply Nets_12" [InNet('+3V3_IMU')] p3: voltage=0.000
SupplyNets "Schematic Supply Nets_11" [InNet('+VBATT')] p4: voltage=0.000
SupplyNets "Schematic Supply Nets_10" [InNet('+3V3')] p5: voltage=0.000
SupplyNets "Schematic Supply Nets_9" [InNet('GND')] p6: voltage=0.000
SupplyNets "Schematic Supply Nets" [InNet('+5V')] p7: voltage=0.000
Width S50 [InNetClass('S50')] p1: maxlimit=0.192 minlimit=0.134 preferedwidth=0.167 toplayer_minwidth=0.192 toplayer_prefwidth=0.192 midlayer1_maxwidth=0.134 midlayer1_prefwidth=0.134 midlayer2_minwidth=0.167 midlayer2_maxwidth=0.167 midlayer3_minwidth=0.166 midlayer3_maxwidth=0.166 midlayer3_prefwidth=0.166 midlayer4_minwidth=0.167 midlayer4_maxwidth=0.167 midlayer5_minwidth=0.166 midlayer5_maxwidth=0.166 midlayer5_prefwidth=0.166 midlayer6_maxwidth=0.134 midlayer6_prefwidth=0.134 bottomlayer_minwidth=0.192 bottomlayer_prefwidth=0.192 impedanceprofiledriven=TRUE impedanceprofileid={CB12E08D-39B5-4291-ADF7-3A3A6DAE095F} impedanceprofilevalue=50.000000 minimp=50.000000 maximp=50.000000 favimp=50.000000
Width [All] p2: maxlimit=2.54 minlimit=0.089 preferedwidth=0.381
24 further rules are at their usual default settings.

## Classes and differential pairs
net class S50: AUX_MISO AUX_MOSI AUX_SCK CLK CMD DAT0 DAT1 DAT2 DAT3 IMU_CS IMU_INT1 IMU_MISO IMU_MOSI IMU_SCK OSD_CS SDIO_CLK SDIO_CMD SDIO_D0 SDIO_D1 SDIO_D2 SDIO_D3
component class U_μC-Core: C1 C3 C7 C9 C11 C12 C13 C14 C19 C26 C27 C28 C31 C32 C33 R1 R2 R3 R4 S1 S2 Y1 z
component class U_Sensors: C30 C34 C35 C36 C37 C38 C39 C40 C41 C44 C46 C47 IC2 IC3 IC4 IC5 IC6 J4 R19 R21 R22 R23 R25 R26 R27 R28 R29 R30 R48 R49 R50 R51 R52 Y2
component class U_Pyro-Other: C42 C45 C49 D5 D6 D7 D8 F1 F2 F3 IC7 J16 J18 J19 J20 J21 J22 LS1 Q1 Q2 Q3 Q4 R17 R18 R20 R24 R31 R32 R33 R34 R35 R36 R37 R38 R39 R40 R41 R42 R43 R45 R46 R47 U4
component class U_Power-scheme: C2 C4 C5 C6 C8 C10 C15 C16 C17 C18 C20 C21 C22 C23 C24 C25 C29 C43 C48 D1 D2 D3 D4 IC1 J1 J2 J3 L1 L2 R5 R6 R7 R8 R9 R10 R11 R12 R13 R14 R15 R16 U1 U2
component class U_Headers-SolderPads: H1 J5 J6 J7 J8 J9 J10 J11 J12 J13 J14 J15 J17 P1 P2 P3 P4 P5 P6 P7 P8 P9 P10 P11 P12 P13 P14 P15 P16 P17 SB1 SB2
differential pair USB_D: +USB_D_P -USB_D_N
differential pair CAN: +CAN_P -CAN_N

## Components (designator, comment, footprint, x,y, rotation, side; value= is the part's Value field where it differs from the comment)
C1 "0.1 µF" "MURATA GCM155 0402_1005" 91.125,75.875 r180 top
C2 "10 µF" "MURATA GRM21B 0805_2012" 108.65,74.2 r0 bottom
C3 "0.1 µF" "MURATA GCM155 0402_1005" 93,75.875 r0 top
C4 "10 µF" "MURATA GRM21B 0805_2012" 71.2,64.8 r270 bottom
C5 "22 µF" "MURATA GRM21B 0805_2012" 75.2,76 r180 bottom
C6 "22 µF" "MURATA GRM21B 0805_2012" 71.5,76 r0 bottom
C7 "0.1 µF" "MURATA GCM155 0402_1005" 103.55,78.675 r90 top
C8 "10 µF" "MURATA GRM21B 0805_2012" 108.2,81.7 r0 bottom
C9 "0.1 µF" "MURATA GCM155 0402_1005" 87,92.8 r270 top
C10 "10 µF" "MURATA GRM21B 0805_2012" 96.7,99 r180 top
C11 "0.1 µF" "MURATA GCM155 0402_1005" 103.5,91.1 r90 top
C12 "0.1 µF" "MURATA GCM155 0402_1005" 85.469,78.948 r270 top
C13 "0.1 µF" "MURATA GCM155 0402_1005" 98.05,74.8 r0 top
C14 "0.1 µF" "MURATA GCM155 0402_1005" 97.575,75.925 r0 top
C15 "0.1 µF" "MURATA GCM155 0402_1005" 74.2,67.4 r0 bottom
C16 "4.7 µF" "MURATA GRM21B 0805_2012" 77.2,81.2 r90 bottom
C17 "22 µF" "CAP 1206_3216 - 0.8MM" 80.9,79.2 r0 bottom
C18 "22 µF" "CAP 1206_3216 - 0.8MM" 80.9,81.7 r0 bottom
C19 "4.7 µF" "MURATA GRM21B 0805_2012" 83.8,78.2 r270 top
C20 "0.1 µF" "MURATA GCM155 0402_1005" 108.7,76 r0 bottom
C21 "0.1 µF" "MURATA GCM155 0402_1005" 110.5,79.5 r90 bottom
C22 "0.1 µF" "MURATA GCM155 0402_1005" 71.9,87.1 r0 bottom
C23 "10 µF" "CAP 1206_3216 - 0.8MM" 72.8,93.5 r0 bottom
C24 "10 µF" "CAP 1206_3216 - 0.8MM" 77.8,90.9 r180 bottom
C25 "10 µF" "CAP 1206_3216 - 0.8MM" 72.8,90.9 r0 bottom
C26 "2.2 µF" "CAP 0805_2012" 105.3,90.1 r90 top
C27 "2.2 µF" "CAP 0805_2012" 88.5,94.9 r0 top
C28 "1 µF" "CAP 0805_2012" 98.7,73.2 r0 top
C29 "0.1 µF" "MURATA GCM155 0402_1005" 75.4,89 r180 bottom
C30 "0.1 µF" "MURATA GCM155 0402_1005" 108.6,84.8 r0 top
C31 "0.1 µF" "MURATA GCM155 0402_1005" 104,100.5 r180 top
C32 "10 pF" "CAP 0402_1005" 91.3,73.2 r270 top
C33 "10 pF" "CAP 0402_1005" 95,73.2 r90 top
C34 "2.2 µF" "CAP 0805_2012" 108.7,86.4 r0 top
C35 "0.1 µF" "MURATA GCM155 0402_1005" 75.7,80.9 r180 top
C36 "0.1 µF" "MURATA GCM155 0402_1005" 106.5,75.6 r90 top
C37 "22 µF" "MURATA GRM21B 0805_2012" 73.1,91.45 r270 top
C38 "0.1 µF" "MURATA GCM155 0402_1005" 79,91.3 r180 top
C39 "22 µF" "MURATA GRM21B 0805_2012" 75.3,91.4 r270 top
C40 "0.1 µF" "MURATA GCM155 0402_1005" 77.3,89.9 r180 top
C41 "0.1 µF" "MURATA GCM155 0402_1005" 79.1,89.9 r180 top
C42 "0.1 µF" "MURATA GCM155 0402_1005" 82.705,74.599 r270 top
C43 "T523H107M035APE070" CAPPM7360X200N 72.75,98.5 r90 top
C44 "0.1 µF" "MURATA GCM155 0402_1005" 93.56,91.605 r90 bottom
C45 "0.1 µF" "MURATA GCM155 0402_1005" 78.6,77 r0 top
C46 "10 pF" "CAP 0402_1005" 74.8,79.2 r90 top
C47 "10 pF" "CAP 0402_1005" 78.6,79.2 r270 top
C48 "4.7 µF" "MURATA GRM21B 0805_2012" 75.1,81.1 r90 bottom
C49 "0.1 µF" "MURATA GCM155 0402_1005" 97.6,88.2 r270 bottom
D1 "PESD24VS1UA" SOD2512X110N 96.8,97.1 r0 top
D2 "D1213A-02SOL-7" D1213A02SOL7 93.2,97.9 r180 top
D3 "MBR230S1F-7" SODFL3518X115N 89.1,98.2 r0 top
D4 "MBR230S1F-7" SODFL3518X115N 85.5,85.8 r270 bottom
D5 "Red" "LED 0402_1005 RED" 102.1,68.9 r180 bottom
D6 "Red" "LED 0402_1005 RED" 92.675,68.9 r180 bottom
D7 "Red" "LED 0402_1005 RED" 82.9,68.9 r180 bottom
D8 "PESD24VS1UA" SOD2512X110N 108.2,87.5 r180 bottom
F1 "C1F 8" FP-3216FF-IPC_A 79.5,62.504 r270 bottom
F2 "C1F 8" FP-3216FF-IPC_A 89.5,62.504 r270 bottom
F3 "C1F 8" FP-3216FF-IPC_A 99.2,62.5 r270 bottom
H1 "6 pin pad" "6 pin pad-Footprint-1" 84.924,105.824 r180 bottom
IC1 "TLV74033PDBVR" SOT95P280X145-5N 108.2,78.7 r90 bottom
IC2 "BMP390" BMP390 104.6,75.5 r0 top
IC3 "MAX7456EUI+" SOP65P638X110-29N 78.301,85.346 r90 top
IC4 "ICM-42688-P" IIM42352 108.1,82.5 r90 top
IC5 "TPD4E001RDBVR" SOT95P280X145-6N 106.1,105.3 r90 bottom
IC6 "TPD4E001RDBVR" SOT95P280X145-6N 109.9,105.3 r90 bottom
IC7 "MX25L25645GM2I-08G" SOIC127P790X216-8N 94.065,84 r90 bottom
J1 "Solder Pad 4x5mm" "Solder Pad 4x5mm-Footprint-1" 74.1,106.025 r180 top
J2 "Solder Pad 4x5mm" "Solder Pad 4x5mm-Footprint-1" 79.8,106.025 r180 top
J3 "UJ20-C-H-G-SMT-5-P16-TR" UJ20CHGSMT5P16TR 93.7,105.1 r180 top
J4 "MSD-1-A" MSD1A 94.7,100.675 r0 bottom
J5 "SM10B-SRSS-TB_LF__SN_" SM10B-SRSS-TB 100,64.458 r0 top
J6 "SM05B-GHS" SM05B-GHS-TB 113.925,68.775 r90 top
J7 "SM03B-GHS-TB(LF)(SN)" FP-SM03B-GHS-TB_LF_SN-MFG 115.975,65.7 r270 bottom
J8 "SM03B-GHS-TB(LF)(SN)" FP-SM03B-GHS-TB_LF_SN-MFG 115.975,73.2 r270 bottom
J9 "SM03B-GHS-TB(LF)(SN)" FP-SM03B-GHS-TB_LF_SN-MFG 115.975,80.7 r270 bottom
J10 "SM03B-GHS-TB(LF)(SN)" FP-SM03B-GHS-TB_LF_SN-MFG 115.975,88.2 r270 bottom
J11 "SM03B-GHS-TB(LF)(SN)" FP-SM03B-GHS-TB_LF_SN-MFG 115.975,95.7 r270 bottom
J12 "SM03B-GHS-TB(LF)(SN)" FP-SM03B-GHS-TB_LF_SN-MFG 115.975,103.2 r270 bottom
J13 "SM05B-GHS-TB_LF__SN_" SM05B-GHS-TB 113.925,78.7 r90 top
J14 "SM04B-GHS-TB_LF__SN_" SM04B-GHS-TB 113.925,88 r90 top
J15 "SM04B-GHS-TB_LF__SN_" SM04B-GHS-TB 109.225,104.3 r180 top
J16 "2065-101_998-403" 2065101998403 82.587,64.025 r90 bottom
J17 "SM06B-GHS-TB_LF__SN_" SM06B-GHS-TB 118.025,92.625 r90 top
J18 "2065-101_998-403" 2065101998403 92.587,64.025 r90 bottom
J19 "2065-101_998-403" 2065101998403 102.187,64.025 r90 bottom
J20 "2065-101_998-403" 2065101998403 86.387,64.025 r90 bottom
J21 "2065-101_998-403" 2065101998403 95.987,64.025 r90 bottom
J22 "2065-101_998-403" 2065101998403 105.787,64.025 r90 bottom
L1 "VLS6045EX-150M" VLS6045 72.9,71.1 r90 bottom
L2 "XAL5030-222MEC" XAL5030222MEC 80.998,85.975 r270 bottom
LS1 "CMT-7525-03-SMT-TR" CMT752503SMTTR 108.4,92.2 r270 bottom
P1 "Solder Pad 2x1.5mm" "Solder Pad 2x1.5mm-Footprint-1" 70.5,86.3 r0 top
P2 "Solder Pad 2x1.5mm" "Solder Pad 2x1.5mm-Footprint-1" 70.5,84.2 r0 top
P3 "Solder Pad 2x1.5mm" "Solder Pad 2x1.5mm-Footprint-1" 70.5,74.7 r180 top
P4 "Solder Pad 2x1.5mm" "Solder Pad 2x1.5mm-Footprint-1" 70.5,90.1 r0 top
P5 "Solder Pad 2x1.5mm" "Solder Pad 2x1.5mm-Footprint-1" 70.6,65.2 r0 top
P6 "Solder Pad 2x1.5mm" "Solder Pad 2x1.5mm-Footprint-1" 70.5,72.8 r0 top
P7 "Solder Pad 2x1.5mm" "Solder Pad 2x1.5mm-Footprint-1" 70.5,69 r0 top
P8 "Solder Pad 2x1.5mm" "Solder Pad 2x1.5mm-Footprint-1" 70.5,82.3 r0 top
P9 "Solder Pad 2x1.5mm" "Solder Pad 2x1.5mm-Footprint-1" 70.5,76.6 r180 top
P10 "Solder Pad 2x1.5mm" "Solder Pad 2x1.5mm-Footprint-1" 70.5,92 r180 top
P11 "Solder Pad 2x1.5mm" "Solder Pad 2x1.5mm-Footprint-1" 70.6,63.3 r0 top
P12 "Solder Pad 2x1.5mm" "Solder Pad 2x1.5mm-Footprint-1" 70.5,70.9 r180 top
P13 "Solder Pad 2x1.5mm" "Solder Pad 2x1.5mm-Footprint-1" 70.5,88.2 r180 top
P14 "Solder Pad 2x1.5mm" "Solder Pad 2x1.5mm-Footprint-1" 70.5,78.5 r180 top
P15 "Solder Pad 2x1.5mm" "Solder Pad 2x1.5mm-Footprint-1" 70.5,67.1 r180 top
P16 "Solder Pad 2x1.5mm" "Solder Pad 2x1.5mm-Footprint-1" 70.5,80.4 r180 top
P17 "S6B-PH-SM4-TB(LF)(SN)" JST-S6B-PH-SM4-TB(LF)(SN)_V 90.3,64.6 r0 top
Q1 "SSM6K513NU,LF" SSM6K513NULF 86.3,70.725 r90 bottom
Q2 "SSM6K513NU,LF" SSM6K513NULF 96,70.825 r90 bottom
Q3 "SSM6K513NU,LF" SSM6K513NULF 103.4,70.725 r90 bottom
Q4 "PMV20XNER" SOT95P230X110-3N 101.4,89.6 r270 bottom
R1 "10k" "YAGEO RES 0402_1005" 103.9,98.3 r180 top
R2 "4.7k" "YAGEO RES 0402_1005" 84.7,84.8 r90 top
R3 "4.7k" "YAGEO RES 0402_1005" 84.7,82.5 r270 top
R4 "10k" "YAGEO RES 0402_1005" 83.4,100.3 r180 top
R5 "10k" "YAGEO RES 0402_1005" 72.6,62.1 r180 bottom
R6 "10k" "YAGEO RES 0402_1005" 105.9,78.5 r90 bottom
R7 "182k" "YAGEO RES 0402_1005" 74.9,62.1 r0 bottom
R8 "62k" "YAGEO RES 0402_1005" 76,64.3 r90 bottom
R9 "2.2R" "YAGEO RES 0402_1005" 72.1,88.4 r180 bottom
R10 "73.2k" "YAGEO RES 0402_1005" 73.3,82.4 r270 bottom
R11 "100k" "YAGEO RES 0402_1005" 70.7,82.4 r90 bottom
R12 "100k" "YAGEO RES 0402_1005" 71.7,85.8 r0 bottom
R13 "10k" "YAGEO RES 0402_1005" 72,82.4 r270 bottom
R14 "200k" "YAGEO RES 0402_1005" 71.7,84.5 r0 bottom
R15 "5.1k" "YAGEO RES 0402_1005" 99,104 r270 top
R16 "5.1k" "YAGEO RES 0402_1005" 88.4,104 r270 top
R17 "4.7k" "YAGEO RES 0402_1005" 82.6,70.7 r270 bottom
R18 "4.7k" "YAGEO RES 0402_1005" 92.4,70.8 r90 bottom
R19 "100k" "YAGEO RES 0402_1005" 87,76.1 r270 top
R20 "4.7k" "YAGEO RES 0402_1005" 99.9,70.2 r270 bottom
R21 "13k" "YAGEO RES 0402_1005" 85.7,76.1 r90 top
R22 "22R" "YAGEO RES 0402_1005" 90.5,91.5 r270 bottom
R23 "75 Ohms" "RES 0805_2012" 78.3,92.9 r0 top
R24 "10k" "YAGEO RES 0402_1005" 97.6,85.9 r90 bottom
R25 "22R" "YAGEO RES 0402_1005" 89.2,91.5 r270 bottom
R26 "22R" "YAGEO RES 0402_1005" 97.4,91.4 r270 bottom
R27 "47k" "YAGEO RES 0402_1005" 103.5,101.9 r270 bottom
R28 "47k" "YAGEO RES 0402_1005" 103.6,106.7 r270 bottom
R29 "75 Ohms" "RES 0805_2012" 82,92 r270 top
R30 "47k" "YAGEO RES 0402_1005" 103.5,95.1 r270 bottom
R31 "100R" "RES 0402_1005" 84.71,72.619 r0 bottom
R32 "100R" "RES 0402_1005" 94.3,72.6 r0 bottom
R33 "100R" "RES 0402_1005" 101.8,72.6 r0 bottom
R34 "100k" "YAGEO RES 0402_1005" 87.7,68.9 r180 bottom
R35 "100k" "YAGEO RES 0402_1005" 97.5,69.025 r180 bottom
R36 "100k" "YAGEO RES 0402_1005" 105.425,69.125 r270 bottom
R37 "100k" "YAGEO RES 0402_1005" 84.2,70.725 r90 bottom
R38 "100k" "YAGEO RES 0402_1005" 93.8,70.825 r90 bottom
R39 "100k" "YAGEO RES 0402_1005" 101.2,70.825 r90 bottom
R40 "10k" "YAGEO RES 0402_1005" 92.9,78.6 r0 bottom
R41 "10k" "YAGEO RES 0402_1005" 88.2,70.725 r270 bottom
R42 "10k" "YAGEO RES 0402_1005" 101.3,92.2 r180 bottom
R43 "10k" "YAGEO RES 0402_1005" 97.9,71.1 r270 bottom
R45 "10k" "YAGEO RES 0402_1005" 105.45,71.475 r270 bottom
R46 "120 Ohms" "KOA RES RK73 RN73 0603_1608" 76.5,74.4 r270 top
R47 "100R" "RES 0402_1005" 99.1,91.2 r90 bottom
R48 "47k" "YAGEO RES 0402_1005" 103.5,97.4 r270 bottom
R49 "47k" "YAGEO RES 0402_1005" 103.5,99.6 r270 bottom
R50 "22R" "YAGEO RES 0402_1005" 96.1,91.4 r270 bottom
R51 "22R" "YAGEO RES 0402_1005" 92.3,91.5 r270 bottom
R52 "22R" "YAGEO RES 0402_1005" 94.8,91.4 r270 bottom
S1 "TS09-63-25-WT-160-SMT-TR" TS096325WT160SMTTR 85.4,104.25 r90 top
S2 "TS09-63-25-WT-160-SMT-TR" TS096325WT160SMTTR 102,104.225 r90 top
SB1 "Solder Bridge 3-way" "Solder Bridge 3-way-Footprint-1"#1 87.1,72.1 r90 top
SB2 "Solder Bridge 3-way" "Solder Bridge 3-way-Footprint-1"#2 111.5,93.2 r180 top
U1 "AP63200WU-7" FP-TSOT26-MFG 73.8,64.899 r90 bottom
U2 "SIC438AED-T1-GE3" FP-T22-0442-MFG 75.398,85.975 r270 bottom
U4 "ATA6561-GBQW-N" FP-C04-21358-IPC_B 79.6,74.5 r180 top
Y1 "XRCGB48M000F4M02R0" XRCGB 93.1,73.2 r0 top
Y2 "XRCGB27M000FAN00R0" XRCGB 76.725,79.2 r180 top
z "STM32H743VIT6" FP-LQFP100-1L-IPC_C 94.49,84.964 r90 top (schematic designator U3)

## Footprints (in the part's own frame and the unit in brackets; to place one, negate y for a bottom-side part, rotate by r counter-clockwise, add the part's x,y. Pads: shape width x height; smd on the part's side, far side on the other; paste and mask are expansions set on the pad)
"6 pin pad-Footprint-1" [mm]
  round 1 smd: 1(0,0) 2(0,-1.524) 3(0,-3.048) 4(1.524,-3.048) 5(1.524,-1.524) 6(1.524,0)
  silkscreen extent -1.02,0.64 -0.76,0.89
2065101998403 [mm]
  rect 4.6x2 smd: 1(0.625,-0.013)
  rect 2.3x1.65 smd: 2(-2.825,0.013)
  silkscreen extent 3.98,-1.15 3.98,1.15, body extent -4,-1.68 4,1.08, height 2.7
BMP390 [mm]
  rect 0.25x0.275 smd: 1(0.25,0.763) 2(-0.25,0.763) 6(-0.25,-0.763) 7(0.25,-0.763)
  rect 0.275x0.25 smd: 3(-0.762,0.5) 4(-0.762,0) 5(-0.762,-0.5) 8(0.762,-0.5) 9(0.762,0) 10(0.762,0.5)
  silkscreen extent 0.2,1.3 0.3,1.4, body extent -1,-1.08 1,0.92, height 0.73
"CAP 0402_1005" [mm] "Chip Capacitor, 2-Leads, Body 1.02x0.51mm, IPC Medium Density"
  rect 0.6x0.64 smd: 1(-0.44,0) 2(0.44,0)
  silkscreen extent -1,-0.5 1,0.5, body extent -0.5,-0.26 0.5,0.26, height 0.52
"CAP 0805_2012" [mm] "Chip Capacitor, 2-Leads, Body 2.00x1.20mm, IPC Medium Density"
  rect 1.3x1.4 smd: 1(-0.8,0) 2(0.8,0)
  silkscreen extent -1.7,-0.9 1.7,0.9, body extent -1,-0.64 1,0.64, height 1.26
"CAP 1206_3216 - 0.8MM" [mm] "Chip Capacitor, 2-Leads, Body 3.25x1.60mm, IPC Medium Density"
  rect 1.3x1.8 smd: 1(-1.45,0) 2(1.45,0)
  silkscreen extent -2.37,-1.13 2.37,1.13, body extent -1.6,-0.8 1.6,0.8, height 0.8
CAPPM7360X200N [mm]
  rect 2.65x4.5 smd: 1(-2.95,0) 2(2.95,0)
  silkscreen extent -3.65,-3 3.65,-3, body extent -3.81,-3.15 3.8,3.15, height 2.01
CMT752503SMTTR [mm]
  rect 1.8x1.8 smd: 1(3.075,-3.075) 2(3.075,3.075) 3(-3.075,3.075) 4(-3.075,-3.075)
  silkscreen extent -3.75,-3.12 4.5,3.75, body extent -3.78,-3.75 3.72,3.75, height 2.5
D1213A02SOL7 [mm]
  rect 0.8x0.9 smd: 1(-0.95,-1) 2(0.95,-1) 3(0,1)
  silkscreen extent -1.45,-2 1.45,0.65, body extent -1.45,-1.37 1.45,1.37, height 1.3
FP-3216FF-IPC_A [mm]
  rect 1.515x1.906 smd paste+0 mask+0: 1(-1.496,0) 2(1.496,0)
  silkscreen extent -0.36,-0.8 0.36,0.8, body extent -1.6,-0.8 1.6,0.8, height 1.09
FP-C04-21358-IPC_B [mm]
  rect 0.856x0.292 smd paste+0 mask+0: 1(-1.428,0.975)
  rrect100% 0.856x0.292 smd paste+0 mask+0: 2(-1.428,0.325) 3(-1.428,-0.325) 4(-1.428,-0.975) 5(1.428,-0.975) 6(1.428,-0.325) 7(1.428,0.325) 8(1.428,0.975)
  rect 1.7x2.5 smd paste-1000 mask+0: 9(0,0)
  silkscreen extent -2.53,-1.5 1.5,1.5, body extent -2.11,-1.75 2.11,1.75, height 0.25
FP-LQFP100-1L-IPC_C [mm]
  rect 1.355x0.212 smd paste+0 mask+0: 1(-7.575,6)
  rrect100% 1.355x0.212 smd paste+0 mask+0: 2(-7.575,5.5) 3(-7.575,5) 4(-7.575,4.5) 5(-7.575,4) 6(-7.575,3.5) 7(-7.575,3) 8(-7.575,2.5) 9(-7.575,2) 10(-7.575,1.5) 11(-7.575,1) 12(-7.575,0.5) 13(-7.575,0) 14(-7.575,-0.5) 15(-7.575,-1) 16(-7.575,-1.5) 17(-7.575,-2) 18(-7.575,-2.5) 19(-7.575,-3) 20(-7.575,-3.5) 21(-7.575,-4) 22(-7.575,-4.5) 23(-7.575,-5) 24(-7.575,-5.5) 25(-7.575,-6) 51(7.575,-6) 52(7.575,-5.5) 53(7.575,-5) 54(7.575,-4.5) 55(7.575,-4) 56(7.575,-3.5) 57(7.575,-3) 58(7.575,-2.5) 59(7.575,-2) 60(7.575,-1.5) 61(7.575,-1) 62(7.575,-0.5) 63(7.575,0) 64(7.575,0.5) 65(7.575,1) 66(7.575,1.5) 67(7.575,2) 68(7.575,2.5) 69(7.575,3) 70(7.575,3.5) 71(7.575,4) 72(7.575,4.5) 73(7.575,5) 74(7.575,5.5) 75(7.575,6)
  rrect100% 0.212x1.355 smd paste+0 mask+0: 26(-6,-7.575) 27(-5.5,-7.575) 28(-5,-7.575) 29(-4.5,-7.575) 30(-4,-7.575) 31(-3.5,-7.575) 32(-3,-7.575) 33(-2.5,-7.575) 34(-2,-7.575) 35(-1.5,-7.575) 36(-1,-7.575) 37(-0.5,-7.575) 38(0,-7.575) 39(0.5,-7.575) 40(1,-7.575) 41(1.5,-7.575) 42(2,-7.575) 43(2.5,-7.575) 44(3,-7.575) 45(3.5,-7.575) 46(4,-7.575) 47(4.5,-7.575) 48(5,-7.575) 49(5.5,-7.575) 50(6,-7.575) 76(6,7.575) 77(5.5,7.575) 78(5,7.575) 79(4.5,7.575) 80(4,7.575) 81(3.5,7.575) 82(3,7.575) 83(2.5,7.575) 84(2,7.575) 85(1.5,7.575) 86(1,7.575) 87(0.5,7.575) 88(0,7.575) 89(-0.5,7.575) 90(-1,7.575) 91(-1.5,7.575) 92(-2,7.575) 93(-2.5,7.575) 94(-3,7.575) 95(-3.5,7.575) 96(-4,7.575) 97(-4.5,7.575) 98(-5,7.575) 99(-5.5,7.575) 100(-6,7.575)
  silkscreen extent -7.7,-6.25 6.25,6.83, body extent -8.35,-8.35 8.35,8.35, height 0.25
FP-SM03B-GHS-TB_LF_SN-MFG [mm]
  rect 0.6x1.7 smd paste+0 mask+0: 1(-1.25,2.275) 2(0,2.275) 3(1.25,2.275)
  rect 1x2.7 smd paste+0 mask+0: 4(-3.1,-0.925) 5(3.1,-0.925)
  silkscreen extent -3.5,0.82 3.5,3.8, body extent -3.5,-2.03 3.5,2.82, height 4.25
FP-T22-0442-MFG [mm]
  round 0.827 smd paste+0 mask+0: 1-2-26(-1.184,0.684)
  round 1.08 smd paste+0 mask+0: 3-4-27(-0.613,-0.675)
  round 0.272 smd paste+0 mask+0: 5-6-7-8-9(-1.444,-1.756)
  rect 0.3x0.73 smd paste+0 mask+0: 10(1.025,-1.935)
  rect 0.725x0.3 smd paste+0 mask+0: 11(1.938,-1.425) 12(1.937,-0.975) 13(1.938,-0.525) 14(1.937,-0.075) 15(1.937,0.375) 16(1.937,0.825) 17(1.937,1.275)
  rect 0.3x0.725 smd paste+0 mask+0: 18(1.475,1.937) 19(1.025,1.938) 20(0.575,1.938) 21(0.125,1.937) 22(-0.575,1.937) 23(-1.025,1.938) 24(-1.475,1.937)
  rect 1.575x1.05 smd paste+0 mask+0: 25(0.488,0.75)
  rect 0.58x0.38 smd paste+0 mask+0: 28(0.985,-0.99)
  L1(SIG) region: -2.3,0.975 -1.75,0.975 -1.75,1.275 -0.6,1.275 -0.6,0.225 -2.3,0.225 -2.3,0.525 -1.75,0.525 -1.75,0.675 -2.3,0.675 -2.3,0.975
  L1(SIG) region: -2.3,-0.375 -1.75,-0.375 -1.75,-0.075 1.075,-0.075 1.075,-0.53 0.425,-0.53 0.425,-1.275 -1.75,-1.275 -1.75,-1.125 -2.3,-1.125 -2.3,-0.825 -1.75,-0.825 -1.75,-0.675 -2.3,-0.675 -2.3,-0.375
  L1(SIG) region: -1.625,-2.3 -1.625,-1.575 0.725,-1.575 0.725,-2.3 0.425,-2.3 0.425,-1.85 0.275,-1.85 0.275,-2.3 -0.025,-2.3 -0.025,-1.85 -0.425,-1.85 -0.425,-2.3 -0.725,-2.3 -0.725,-1.85 -0.875,-1.85 -0.875,-2.3 -1.175,-2.3 -1.175,-1.85 -1.325,-1.85 -1.325,-2.3
  silkscreen extent -2.62,1.27 -2.38,1.52, body extent -2,-2 2,2, height 0.8
FP-TSOT26-MFG [mm]
  rect 1x0.7 smd paste+0 mask+0: 1(-1.1,0.95) 2(-1.1,0) 3(-1.1,-0.95) 4(1.1,-0.95) 5(1.099,0) 6(1.099,0.95)
  silkscreen extent -2.02,2.28 -1.77,2.53, body extent -1.4,-1.45 1.4,1.45, height 1
IIM42352 [mm]
  rect 0.6x0.3 smd: 1(-1.15,0.75) 2(-1.15,0.25) 3(-1.15,-0.25) 4(-1.15,-0.75) 8(1.15,-0.75) 9(1.15,-0.25) 10(1.15,0.25) 11(1.15,0.75)
  rect 0.3x0.6 smd: 5(-0.5,-0.9) 6(0,-0.9) 7(0.5,-0.9) 12(0.5,0.9) 13(0,0.9) 14(-0.5,0.9)
  silkscreen extent -1.55,-1.25 1.5,1.55, body extent -1.5,-1.25 1.5,1.25, height 0.9
JST-S6B-PH-SM4-TB(LF)(SN)_V [mm] "SMD, 2-Leads, Body 15.9x7.6mm, Pitch 2mm"
  rect 1x3.5 smd: 1(-5,2.875) 2(-3,2.875) 3(-1,2.875) 4(1,2.875) 5(3,2.875) 6(5,2.875)
  rect 1.5x3.4 smd: MP1(-7.35,-2.875) MP2(7.35,-2.875)
  silkscreen extent -8.62,-0.77 7.95,3.23, body extent -7.95,-4.38 7.95,4.22, height 5.6
"KOA RES RK73 RN73 0603_1608" [mm] "Chip Resistor, 2-Leads, Body 1.60x0.80mm"
  rect 0.5x0.6 smd: 1(-0.75,0) 2(0.75,0)
  silkscreen extent -1.23,-0.53 1.23,0.53, body extent -0.8,-0.4 0.8,0.4, height 0.45
"LED 0402_1005 RED" [mm] "Chip Diode, 2-Leads, Body 1.00x0.50mm, IPC Medium Density"
  rect 0.75x0.6 smd: 1(-0.575,0) 2(0.575,0)
  silkscreen extent -1.14,-0.51 1.27,0.51, body extent -0.5,-0.25 0.5,0.25, height 0.21
MSD1A [mm]
  rect 0.7x1.6 smd: 1(2.25,7.1) 2(1.15,7.1) 3(0.05,7.1) 4(-1.05,7.1) 5(-2.15,7.1) 6(-3.25,7.1) 7(-4.35,7.1) 8(-5.45,7.1) CD1(-6.55,7.1)
  rect 1.6x1.5 smd: 9(6.85,6.05)
  rect 1.2x1.8 smd: 10(-7.75,5.8)
  rect 1.2x2.2 smd: 11(7.75,-3.5) 12(-7.75,-3.5)
  round 0.5 hole 1 unplated: 13(3.05,-3.9) 14(-4.95,-3.9)
  silkscreen extent -7.43,-6.9 7.43,8.4, body extent -8.08,-7.95 8.07,7.1, height 1.75
"MURATA GCM155 0402_1005" [mm] "Chip Capacitor, 2-Leads, Body 1.0x0.50mm"
  rect 0.4x0.5 smd: 1(-0.4,0) 2(0.4,0)
  silkscreen extent -0.8,-0.48 0.8,0.48, body extent -0.52,-0.27 0.53,0.28, height 0.55
"MURATA GRM21B 0805_2012" [mm] "Chip Capacitor, 2-Leads, Body 2.00x1.25mm"
  rect 0.7x1.3 smd: 1(-0.95,0) 2(0.95,0)
  silkscreen extent -1.58,-0.9 1.58,0.9, body extent -1,-0.63 1,0.63, height 1.25
"RES 0402_1005" [mm] "Chip Resistor, 2-Leads, Body 1.0x0.5mm, IPC Medium Density"
  rect 0.75x0.6 smd: 1(-0.575,0) 2(0.575,0)
  silkscreen extent -1.14,-0.51 1.14,0.51, body extent -0.5,-0.25 0.5,0.25, height 0.35
"RES 0805_2012" [mm] "Chip Resistor, 2-Leads, Body 2.00x1.25mm, IPC Medium Density"
  rect 1.15x1.35 smd: 1(-0.875,0) 2(0.875,0)
  silkscreen extent -1.7,-0.9 1.7,0.9, body extent -1,-0.62 1,0.63, height 0.6
SM04B-GHS-TB [mm]
  rect 0.6x1.7 smd: 1(-1.875,0.2) 2(-0.625,0.2) 3(0.625,0.2) 4(1.875,0.2)
  rect 1x2.7 smd: 5(-3.725,-3) 6(3.725,-3)
  silkscreen extent -4.13,-1.4 4.12,0, body extent -4.12,-4.13 4.13,0.73, height 4.45
SM05B-GHS-TB [mm]
  rect 0.6x1.7 smd: 1(-2.5,0.2) 2(-1.25,0.2) 3(0,0.2) 4(1.25,0.2) 5(2.5,0.2)
  rect 1x2.7 smd: 6(-4.35,-3) 7(4.35,-3)
  silkscreen extent -4.75,-1.43 4.75,1.32, body extent -4.75,-4.23 4.75,0.63, height 4.45
SM06B-GHS-TB [mm]
  rect 0.6x1.7 smd: 1(2.25,4.3) 2(3.5,4.3) 3(4.75,4.3) 4(6,4.3) 5(7.25,4.3) 6(8.5,4.3)
  rect 1x2.7 smd: 7(0.4,1.1) 8(10.35,1.1)
  silkscreen extent 0,2.68 10.75,5.03, body extent 0,-0.07 10.75,4.78, height 4.25
SM10B-SRSS-TB [mm]
  rect 0.6x1.55 smd: 1(1.5,0.342) 2(2.5,0.342) 3(3.5,0.342) 4(4.5,0.342) 5(5.5,0.342) 6(6.5,0.342) 7(7.5,0.342) 8(8.5,0.342) 9(9.5,0.342) 10(10.5,0.342)
  rect 1.2x1.8 smd: 11(0.2,-3.533) 12(11.8,-3.533)
  silkscreen extent -0.38,-2.33 12,1.32, body extent 0,-4.25 12,0.7, height 2.97
SOD2512X110N [mm]
  rect 1.1x0.5 smd: 1(-1.15,0) 2(1.15,0)
  silkscreen extent -1.7,-0.63 0.85,0.63, body extent -1.24,-0.63 1.24,0.62, height 0.93
SODFL3518X115N [mm]
  rect 1.12x1.37 smd: 1(-1.5,0) 2(1.5,0)
  silkscreen extent -2.06,-0.9 1.35,0.9, body extent -1.75,-0.9 1.75,0.9, height 1.15
SOIC127P790X216-8N [mm]
  rect 1.65x0.7 smd: 1(-3.6,1.905) 2(-3.6,0.635) 3(-3.6,-0.635) 4(-3.6,-1.905) 5(3.6,-1.905) 6(3.6,-0.635) 7(3.6,0.635) 8(3.6,1.905)
  silkscreen extent -4.43,-2.62 2.42,2.62, body extent -3.95,-2.62 3.95,2.62, height 1.95
"Solder Bridge 3-way-Footprint-1"#1 [mil]
  round 1 smd mask+3.94: 1(0,78.74) 2(0,3.94) 3(0,-74.8)
  L1(SIG) region: 0,-64.96 29.53,-35.43 29.53,-94.49 -29.53,-94.49 -29.53,-35.43
  L1(SIG) region: 0,68.9 -29.53,39.37 -29.53,98.43 29.53,98.43 29.53,39.37
  L1(SIG) region: 0,-25.59 -29.53,3.94 0,33.46 29.53,3.94
"Solder Bridge 3-way-Footprint-1"#2 [mil]
  round 1 smd mask+3.94: 1(0,59.06) 2(0,0) 3(0,-59.06)
  L1(SIG) region: 0,49.21 -29.53,19.69 -29.53,78.74 29.53,78.74 29.53,19.69
  L1(SIG) region: 0,-49.21 29.53,-19.69 29.53,-78.74 -29.53,-78.74 -29.53,-19.69
  L1(SIG) region: 0,-29.53 -29.53,0 0,29.53 29.53,0
  silkscreen extent -38,-87 37,87
"Solder Pad 2x1.5mm-Footprint-1" [mm]
  rrect30% 2x1.5 smd: 1(0,0)
"Solder Pad 4x5mm-Footprint-1" [mm]
  rrect20% 4x5 hole 0.8: 1(0,0)
SOP65P638X110-29N [mm]
  rect 1.45x0.45 smd: 1(-2.925,4.225) 2(-2.925,3.575) 3(-2.925,2.925) 4(-2.925,2.275) 5(-2.925,1.625) 6(-2.925,0.975) 7(-2.925,0.325) 8(-2.925,-0.325) 9(-2.925,-0.975) 10(-2.925,-1.625) 11(-2.925,-2.275) 12(-2.925,-2.925) 13(-2.925,-3.575) 14(-2.925,-4.225) 15(2.925,-4.225) 16(2.925,-3.575) 17(2.925,-2.925) 18(2.925,-2.275) 19(2.925,-1.625) 20(2.925,-0.975) 21(2.925,-0.325) 22(2.925,0.325) 23(2.925,0.975) 24(2.925,1.625) 25(2.925,2.275) 26(2.925,2.925) 27(2.925,3.575) 28(2.925,4.225)
  rect 3.15x5.65 smd: 29(0,0)
  body extent -3.19,-4.85 3.19,4.85, height 1.1
SOT95P230X110-3N [mm]
  rect 1.05x0.6 smd: 1(-1.1,0.95) 2(-1.1,-0.95) 3(1.1,0)
  silkscreen extent -1.62,-1.45 0.23,1.5, body extent -1.2,-1.45 1.2,1.45, height 0.95
SOT95P280X145-5N [mm]
  rect 1.2x0.6 smd: 1(-1.25,0.95) 2(-1.25,0) 3(-1.25,-0.95) 4(1.25,-0.95) 5(1.25,0.95)
  silkscreen extent -1.85,-1.45 0.3,1.5, body extent -1.4,-1.45 1.4,1.45, height 1.2
SOT95P280X145-6N [mm]
  rect 1.2x0.6 smd: 1(-1.25,0.95) 2(-1.25,0) 3(-1.25,-0.95) 4(1.25,-0.95) 5(1.25,0) 6(1.25,0.95)
  silkscreen extent -1.85,-1.45 0.3,1.6, body extent -1.4,-1.45 1.4,1.45, height 1.2
SSM6K513NULF [mm]
  rect 0.4x0.425 smd: 1(-0.65,-0.938) 2(0,-0.938) 3(0.65,-0.938) 4(0.65,0.938) 5(0,0.938) 6(-0.65,0.938)
  rect 0.95x1.15 smd: 7(-0.325,0)
  rect 0.3x0.75 smd: 8(0.65,0)
  silkscreen extent -1.27,-1.3 -1.18,-1.2, body extent -1,-1.11 1,1.11, height 0.9
TS096325WT160SMTTR [mm]
  rect 1.1x1 smd: 1(-3.75,0) 2(3.75,0)
  silkscreen extent -3.05,-1.85 3.05,1.85, body extent -4.05,-1.85 4.05,1.85, height 2.55
UJ20CHGSMT5P16TR [mm]
  rect 0.6x1.15 smd: A1(-3.2,3.678) A4(-2.4,3.678) B1(3.2,3.678) B4(2.4,3.678)
  rect 0.3x1.15 smd: A5(-1.25,3.678) A6(-0.25,3.678) A7(0.25,3.678) A8(1.25,3.678) B5(1.75,3.678) B6(0.75,3.678) B7(-0.75,3.678) B8(-1.75,3.678)
  round 0.325 hole 0.65 unplated: MH1(-2.89,2.603) MH2(2.89,2.603)
  rect 1.5x1.5 smd: MP1(-5.12,3.103) MP2(5.12,3.103) MP3(-5.12,-0.827) MP4(5.12,-0.827)
  silkscreen extent -4.47,-3.35 4.47,4.8, body extent -5.65,-3.73 5.69,3.87, height 3.08
VLS6045 [mm]
  rect 1.9x5.1 smd: 1(-2.1,0) 2(2.1,0)
  silkscreen extent -4,-0.05 -3.9,0.05, body extent -3,-3 3,3, height 4.5
XAL5030222MEC [mm]
  rect 1.18x4.4 smd: 1(-1.655,0) 2(1.655,0)
  silkscreen extent -3.2,-2.64 2.64,2.64, body extent -2.64,-2.64 2.64,2.64, height 3.2
XRCGB [mm]
  rect 0.75x0.7 smd: 1(-0.675,-0.5) 2(0.675,-0.5) 3(0.675,0.5) 4(-0.675,0.5)
  silkscreen extent -1,-1.12 -0.9,-1.03, body extent -1,-0.8 1,0.8, height 0.7
"YAGEO RES 0402_1005" [mm] "Chip Resistor, 2-Leads, Body 1.0x0.5mm"
  rect 0.5x0.6 smd: 1(-0.5,0) 2(0.5,0)
  silkscreen extent -1,-0.51 1,0.51, body extent -0.5,-0.25 0.5,0.25, height 0.35

## Part data
C1 C3 C7 C9 C11 C12 C13 C14 C15 C20 C21 C22 C29 C30 C31 C35 C36 C38 C40 C41 C42 C44 C45 C49: library part GCM155R71H104ME02D, "CAP CER 0.1UF 50V X7R 0402", Device Package="0402 (1005 Metric)", manufacturer="Murata Electronics", Operating Temperature="-55°C ~ 125°C", Ratings=AEC-Q200, Supplier Part Number 1=490-18204-1-ND, Temperature Coefficient=X7R, Tolerance=±20%, Voltage - Rated=50V, Applications=Automotive, Capacitance="0.1 µF", componentlink1description=Datasheet, componentlink1url=https://psearch.en.murata.com/capacitor/product/GCM155R71H104ME02%23.pdf, componentlink2description="DigiKey Link", componentlink2url=https://www.digikey.com/en/products/detail/murata-electronics/GCM155R71H104ME02D/9867913, lastupdated="7/20/2024 2:04:19 AM", Lifecycle Status=Active, Minimum Order=1, Mounting Type="Surface Mount, MLCC", Package / Case="0402 (1005 Metric)", packaging=TapeAndReel, Part Number=GCM155R71H104ME02D, Part Status=Active, partid=39038, price=0.01, series=GCM, Size / Dimension="0.039\" L x 0.020\" W (1.00mm x 0.50mm)", Supplier 1=DigiKey, Thickness (Max)="0.022\" (0.55mm)"
C2 C4 C8 C10: library part GRM21BR61H106ME43L, "CAP CER 10UF 50V X5R 0805", Device Package="0805 (2012 Metric)", manufacturer="Murata Electronics", Operating Temperature="-55°C ~ 85°C", Supplier Part Number 1=490-18664-1-ND, Temperature Coefficient=X5R, Tolerance=±20%, Voltage - Rated=50V, Applications="General Purpose", Capacitance="10 µF", componentlink1description=Datasheet, componentlink1url=https://search.murata.co.jp/Ceramy/image/img/A01X/G101/ENG/GRM21BR61H106ME43-01A.pdf, componentlink2description="DigiKey Link", componentlink2url=https://www.digikey.com/en/products/detail/murata-electronics/GRM21BR61H106ME43L/10326317, lastupdated="8/27/2024 9:29:56 AM", Lifecycle Status=Active, Minimum Order=1, Mounting Type="Surface Mount, MLCC", Package / Case="0805 (2012 Metric)", packaging=TapeAndReel, Part Number=GRM21BR61H106ME43L, Part Status=Active, partid=41295, price=0.05, series=GRM, Size / Dimension="0.079\" L x 0.049\" W (2.00mm x 1.25mm)", Supplier 1=DigiKey, Thickness (Max)="0.057\" (1.45mm)"
C5 C6 C37 C39: library part GRM21BR61C226ME44L, "CAP CER 22UF 16V X5R 0805", Device Package="0805 (2012 Metric)", manufacturer="Murata Electronics", Operating Temperature="-55°C ~ 85°C", Supplier Part Number 1=490-10747-1-ND, Temperature Coefficient=X5R, Tolerance=±20%, Voltage - Rated=16V, Applications="General Purpose", Capacitance="22 µF", componentlink1description=Datasheet, componentlink1url=https://search.murata.co.jp/Ceramy/image/img/A01X/G101/ENG/GRM21BR61C226ME44-01.pdf, componentlink2description="DigiKey Link", componentlink2url=https://www.digikey.com/en/products/detail/murata-electronics/GRM21BR61C226ME44L/4905531, lastupdated="8/27/2024 9:29:55 AM", Lifecycle Status=Active, Minimum Order=1, Mounting Type="Surface Mount, MLCC", Package / Case="0805 (2012 Metric)", packaging=TapeAndReel, Part Number=GRM21BR61C226ME44L, Part Status=Active, partid=16967, price=0.06, series=GRM, Size / Dimension="0.079\" L x 0.049\" W (2.00mm x 1.25mm)", Supplier 1=DigiKey, Thickness (Max)="0.057\" (1.45mm)"
C16 C19 C48: library part GRM21BR61H475KE51L, "CAP CER 4.7UF 50V X5R 0805", Device Package="0805 (2012 Metric)", manufacturer="Murata Electronics", Operating Temperature="-55°C ~ 85°C", Supplier Part Number 1=490-10751-1-ND, Temperature Coefficient=X5R, Tolerance=±10%, Voltage - Rated=50V, Applications="General Purpose", Capacitance="4.7 µF", componentlink1description=Datasheet, componentlink1url=https://search.murata.co.jp/Ceramy/image/img/A01X/G101/ENG/GRM21BR61H475KE51-01.pdf, componentlink2description="DigiKey Link", componentlink2url=https://www.digikey.com/en/products/detail/murata-electronics/GRM21BR61H475KE51L/4905540, lastupdated="8/27/2024 9:29:55 AM", Lifecycle Status=Active, Minimum Order=1, Mounting Type="Surface Mount, MLCC", Package / Case="0805 (2012 Metric)", packaging=TapeAndReel, Part Number=GRM21BR61H475KE51L, Part Status=Active, partid=15077, price=0.03, series=GRM, Size / Dimension="0.079\" L x 0.049\" W (2.00mm x 1.25mm)", Supplier 1=DigiKey, Thickness (Max)="0.055\" (1.40mm)"
C17 C18: library part GRT31CC81C226ME01L, "CAP CER 22UF 16V X6S 1206", Device Package="1206 (3216 Metric)", manufacturer="Murata Electronics", Operating Temperature="-55°C ~ 105°C", Ratings=AEC-Q200, Supplier Part Number 1=490-12410-1-ND, Temperature Coefficient=X6S, Tolerance=±20%, Voltage - Rated=16V, Applications=Automotive, Capacitance="22 µF", componentlink1description=Datasheet, componentlink1url=https://search.murata.co.jp/Ceramy/image/img/A01X/G101/ENG/GRT31CC81C226ME01-01.pdf, componentlink2description="DigiKey Link", componentlink2url=https://www.digikey.com/en/products/detail/murata-electronics/GRT31CC81C226ME01L/5416832, lastupdated="6/4/2024 7:10:39 PM", Lifecycle Status=Active, Minimum Order=1, Mounting Type="Surface Mount, MLCC", Package / Case="1206 (3216 Metric)", packaging=TapeAndReel, Part Number=GRT31CC81C226ME01L, Part Status=Active, partid=20406, price=0.09, series=GRT, Size / Dimension="0.126\" L x 0.063\" W (3.20mm x 1.60mm)", Supplier 1=DigiKey, Thickness (Max)="0.071\" (1.80mm)"
C23 C24 C25: library part CGA5L3X5R1H106K160AB, "CAP CER 10UF 50V X5R 1206", Device Package="1206 (3216 Metric)", manufacturer="TDK Corporation", Operating Temperature="-55°C ~ 85°C", Ratings=AEC-Q200, Supplier Part Number 1=445-7886-1-ND, Temperature Coefficient=X5R, Tolerance=±10%, Voltage - Rated=50V, Applications=Automotive, Capacitance="10 µF", componentlink1description=Datasheet, componentlink1url=https://product.tdk.com/info/en/catalog/datasheets/mlcc_automotive_general_en.pdf?ref_disty=digikey, componentlink2description="DigiKey Link", componentlink2url=https://www.digikey.com/en/products/detail/tdk-corporation/CGA5L3X5R1H106K160AB/2781312, lastupdated="6/4/2024 7:10:33 PM", Lifecycle Status=Active, Minimum Order=1, Mounting Type="Surface Mount, MLCC", Package / Case="1206 (3216 Metric)", packaging=TapeAndReel, Part Number=CGA5L3X5R1H106K160AB, Part Status=Active, partid=54402, price=0.22, series=CGA, Size / Dimension="0.126\" L x 0.063\" W (3.20mm x 1.60mm)", Supplier 1=DigiKey, Thickness (Max)="0.075\" (1.90mm)"
C26 C27: library part GCM21BL8EG225KE07L, "CAP CER 2.2UF 35V X8L 0805", Device Package="0805 (2012 Metric)", manufacturer="Murata Electronics", Operating Temperature="-55°C ~ 150°C", Ratings=AEC-Q200, Supplier Part Number 1=490-GCM21BL8EG225KE07LCT-ND, Temperature Coefficient=X8L, Tolerance=±10%, Voltage - Rated=35V, Applications=Automotive, Capacitance="2.2 µF", componentlink2description="DigiKey Link", componentlink2url=https://www.digikey.com/en/products/detail/murata-electronics/GCM21BL8EG225KE07L/10700975, lastupdated="2/9/2024 8:15:05 PM", Lifecycle Status=Active, Minimum Order=1, Mounting Type="Surface Mount, MLCC", Package / Case="0805 (2012 Metric)", packaging=TapeAndReel, Part Number=GCM21BL8EG225KE07L, Part Status=Active, partid=40665, price=0.10, series=GCM, Size / Dimension="0.079\" L x 0.049\" W (2.00mm x 1.25mm)", Supplier 1=DigiKey, Thickness (Max)="0.055\" (1.40mm)"
C28: library part GRM219R7YA105MA12D, "CAP CER 1UF 35V X7R 0805", Device Package="0805 (2012 Metric)", manufacturer="Murata Electronics", Operating Temperature="-55°C ~ 125°C", Supplier Part Number 1=490-10495-1-ND, Temperature Coefficient=X7R, Tolerance=±20%, Voltage - Rated=35V, Applications="General Purpose", Capacitance="1 µF", componentlink1description=Datasheet, componentlink1url=https://search.murata.co.jp/Ceramy/image/img/A01X/G101/ENG/GRM219R7YA105MA12-01.pdf, componentlink2description="DigiKey Link", componentlink2url=https://www.digikey.com/en/products/detail/murata-electronics/GRM219R7YA105MA12D/5027580, lastupdated="2/9/2024 8:15:57 PM", Lifecycle Status=Active, Minimum Order=1, Mounting Type="Surface Mount, MLCC", Package / Case="0805 (2012 Metric)", packaging=TapeAndReel, Part Number=GRM219R7YA105MA12D, Part Status=Active, partid=6744, price=0.02, series=GRM, Size / Dimension="0.079\" L x 0.049\" W (2.00mm x 1.25mm)", Supplier 1=DigiKey, Thickness (Max)="0.037\" (0.95mm)"
C32 C46 C47: library part C0402C100K4GAC7867, "CAP CER 10PF 16V C0G/NP0 0402", Capacitance=10pF, Device Package="0402 (1005 Metric)", manufacturer=KEMET, Operating Temperature="-55°C ~ 125°C", Supplier Part Number 1=399-C0402C100K4GAC7867CT-ND, Temperature Coefficient="C0G, NP0", Tolerance=±10%, Voltage - Rated=16V, Applications="General Purpose", componentlink1description=Datasheet, componentlink1url=https://api.kemet.com/component-edge/download/datasheet/C0402C100K4GACTU.pdf, componentlink2description="DigiKey Link", componentlink2url=https://www.digikey.com/en/products/detail/kemet/C0402C100K4GAC7867/2196156, Features="Low ESL", lastupdated="2/9/2024 8:04:15 PM", Lifecycle Status=Active, Minimum Order=1, Mounting Type="Surface Mount, MLCC", Package / Case="0402 (1005 Metric)", packaging=TapeAndReel, Part Number=C0402C100K4GAC7867, Part Status=Active, partid=33741, price=0.05, series="SMD Comm C0G", Size / Dimension="0.039\" L x 0.020\" W (1.00mm x 0.50mm)", Supplier 1=DigiKey, Thickness (Max)="0.022\" (0.55mm)"
C33: library part C0402C100K4GAC7867, "CAP CER 10PF 16V C0G/NP0 0402", Device Package="0402 (1005 Metric)", manufacturer=KEMET, Operating Temperature="-55°C ~ 125°C", Supplier Part Number 1=399-C0402C100K4GAC7867CT-ND, Temperature Coefficient="C0G, NP0", Tolerance=±10%, Voltage - Rated=16V, Applications="General Purpose", Capacitance="10 pF", componentlink1description=Datasheet, componentlink1url=https://api.kemet.com/component-edge/download/datasheet/C0402C100K4GACTU.pdf, componentlink2description="DigiKey Link", componentlink2url=https://www.digikey.com/en/products/detail/kemet/C0402C100K4GAC7867/2196156, Features="Low ESL", lastupdated="2/9/2024 8:04:15 PM", Lifecycle Status=Active, Minimum Order=1, Mounting Type="Surface Mount, MLCC", Package / Case="0402 (1005 Metric)", packaging=TapeAndReel, Part Number=C0402C100K4GAC7867, Part Status=Active, partid=33741, price=0.05, series="SMD Comm C0G", Size / Dimension="0.039\" L x 0.020\" W (1.00mm x 0.50mm)", Supplier 1=DigiKey, Thickness (Max)="0.022\" (0.55mm)"
C34: library part GCJ21BR71E225KA01K, "CAP CER", Device Package="0805 (2012 Metric)", manufacturer="Murata Electronics", Operating Temperature="-55°C ~ 125°C", Ratings=AEC-Q200, Supplier Part Number 1=490-GCJ21BR71E225KA01KCT-ND, Temperature Coefficient=X7R, Tolerance=±10%, Voltage - Rated=25V, Applications="Automotive, Boardflex Sensitive", Capacitance="2.2 µF", componentlink2description="DigiKey Link", componentlink2url=https://www.digikey.com/en/products/detail/murata-electronics/GCJ21BR71E225KA01K/10692344, Features="Soft Termination", lastupdated="2/9/2024 8:15:05 PM", Lifecycle Status=Active, Minimum Order=1, Mounting Type="Surface Mount, MLCC", Package / Case="0805 (2012 Metric)", packaging=TapeAndReel, Part Number=GCJ21BR71E225KA01K, Part Status=Active, partid=46223, price=0.06, series=GCJ, Size / Dimension="0.079\" L x 0.049\" W (2.00mm x 1.25mm)", Supplier 1=DigiKey, Thickness (Max)="0.057\" (1.45mm)"
C43: "Capacitor Polarised", Manufacturer_Name=KEMET, Mouser Part Number=80-T523H107M35APE070, Arrow Part Number=T523H107M035APE070, Arrow Price/Stock=https://www.arrow.com/en/products/t523h107m035ape070/kemet-corporation, Datasheet Link=https://content.kemet.com/datasheets/KEM_T2079_SSD.pdf, Height=2mm, Manufacturer_Part_Number=T523H107M035APE070, Mouser Price/Stock=https://www.mouser.co.uk/ProductDetail/KEMET/T523H107M035APE070?qs=unwgFEO1A6s1KPLWumNkZA%3D%3D